# EAGLE board bombhonor (EAGLE 9.5.2), part 1 of 2
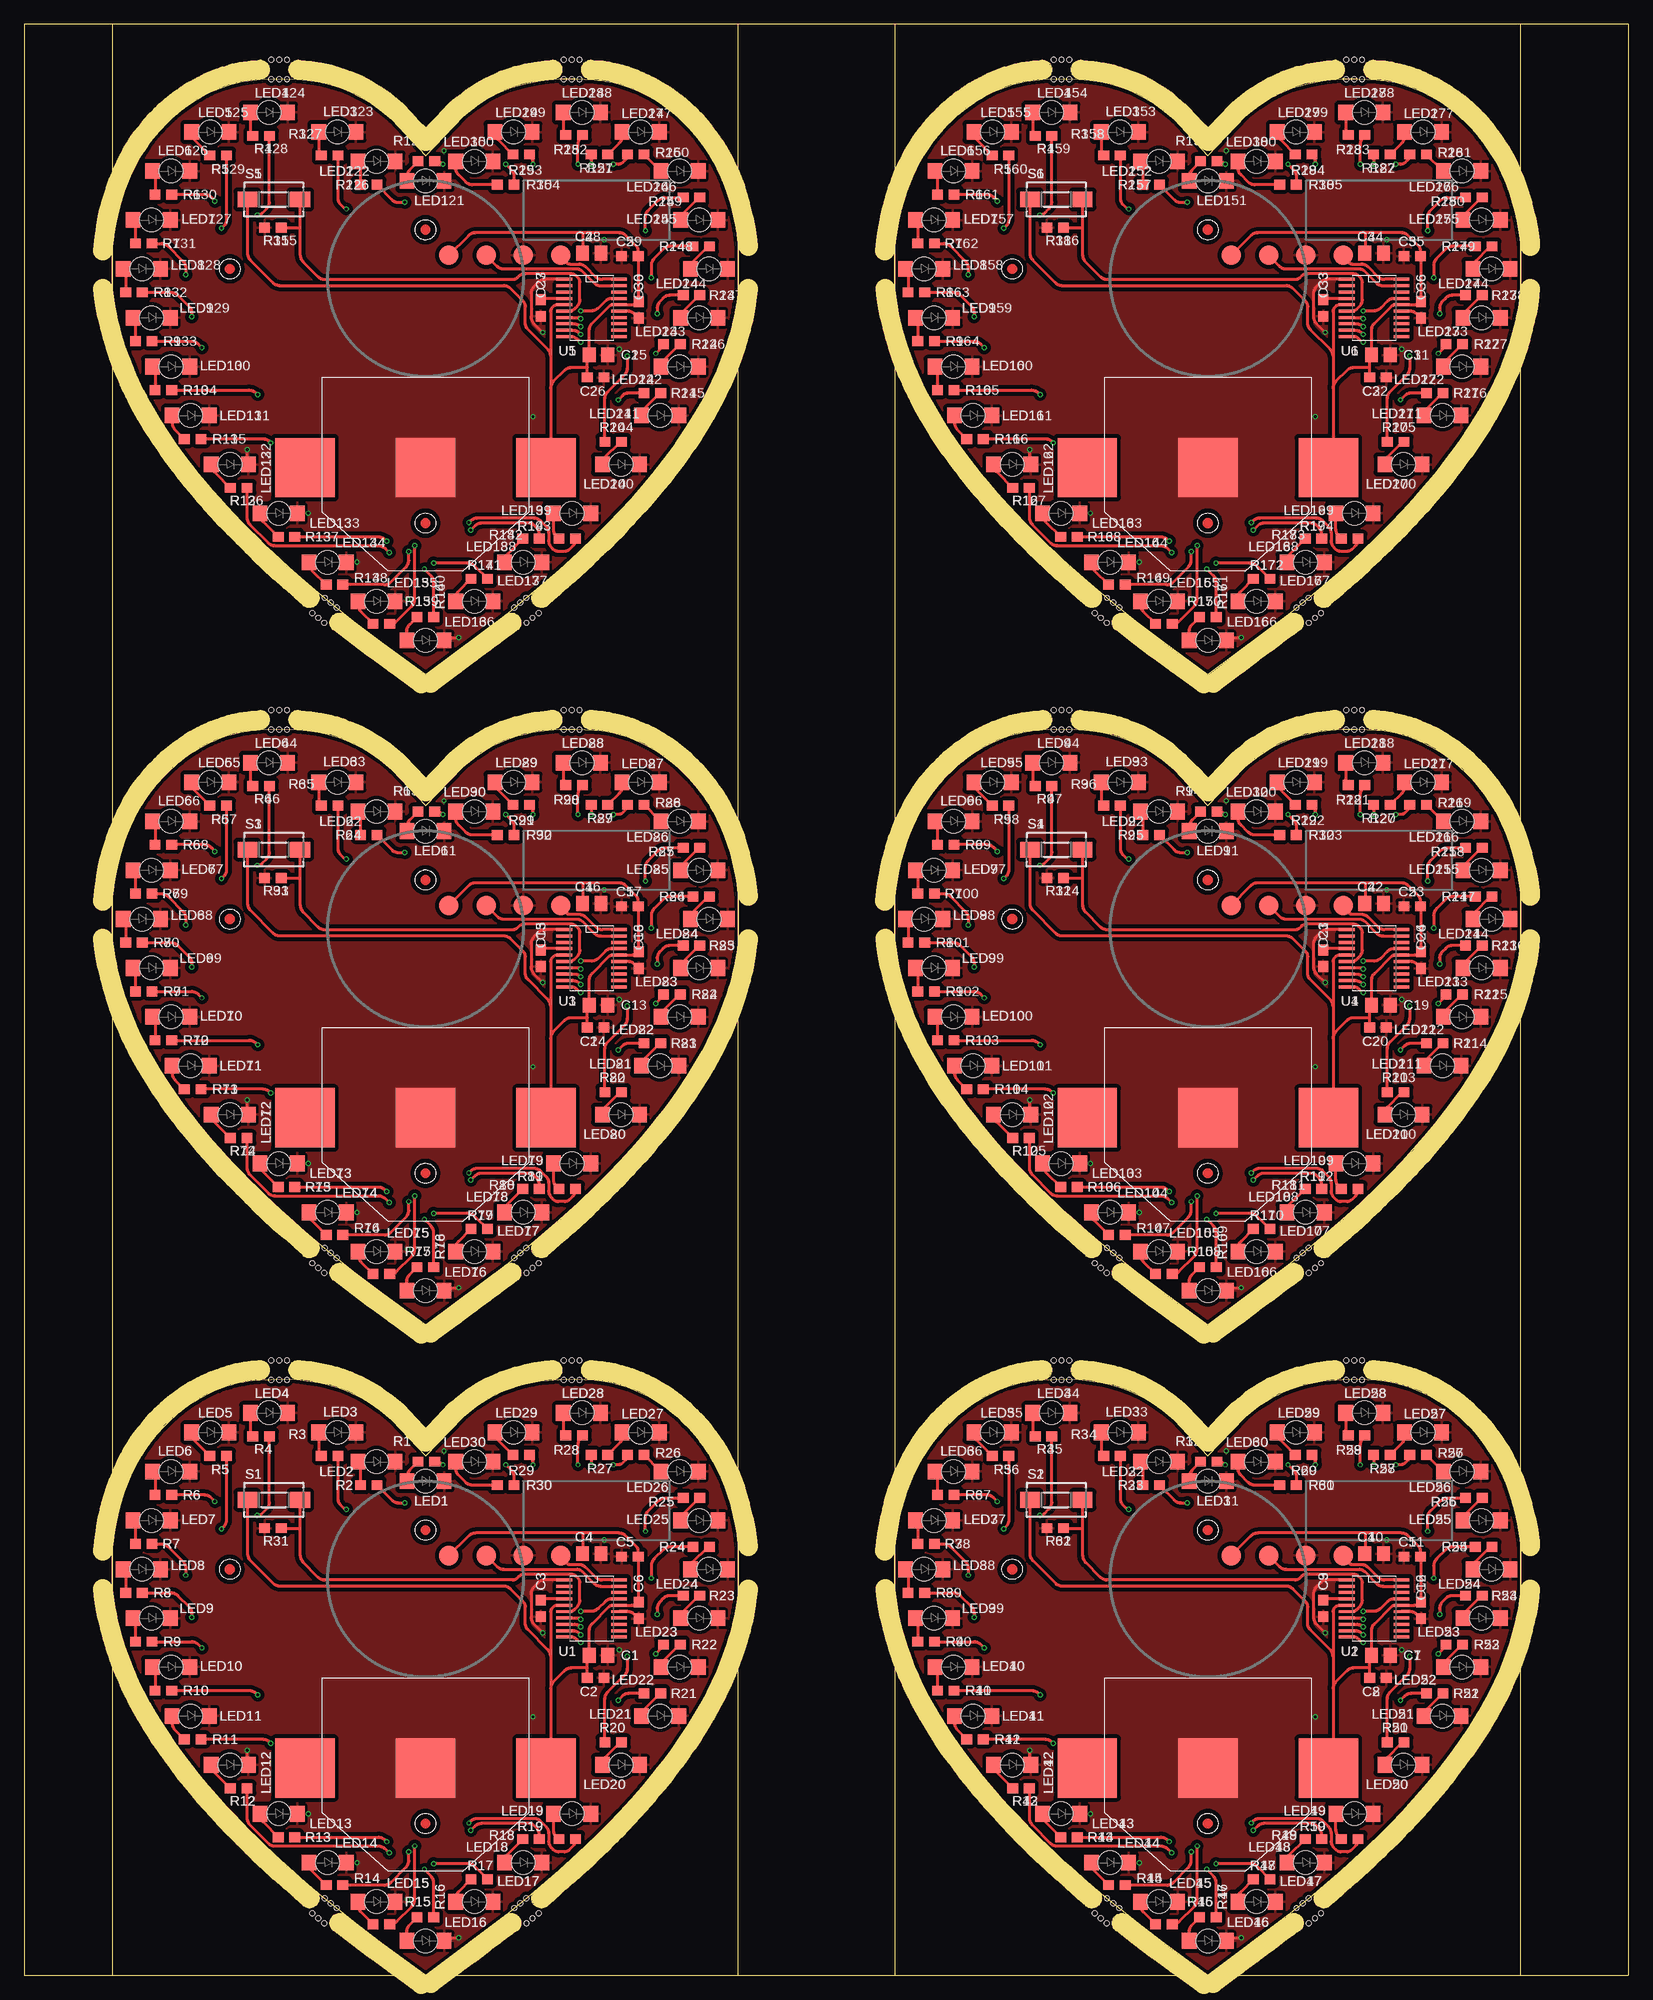
[diagram p0: board, top side]
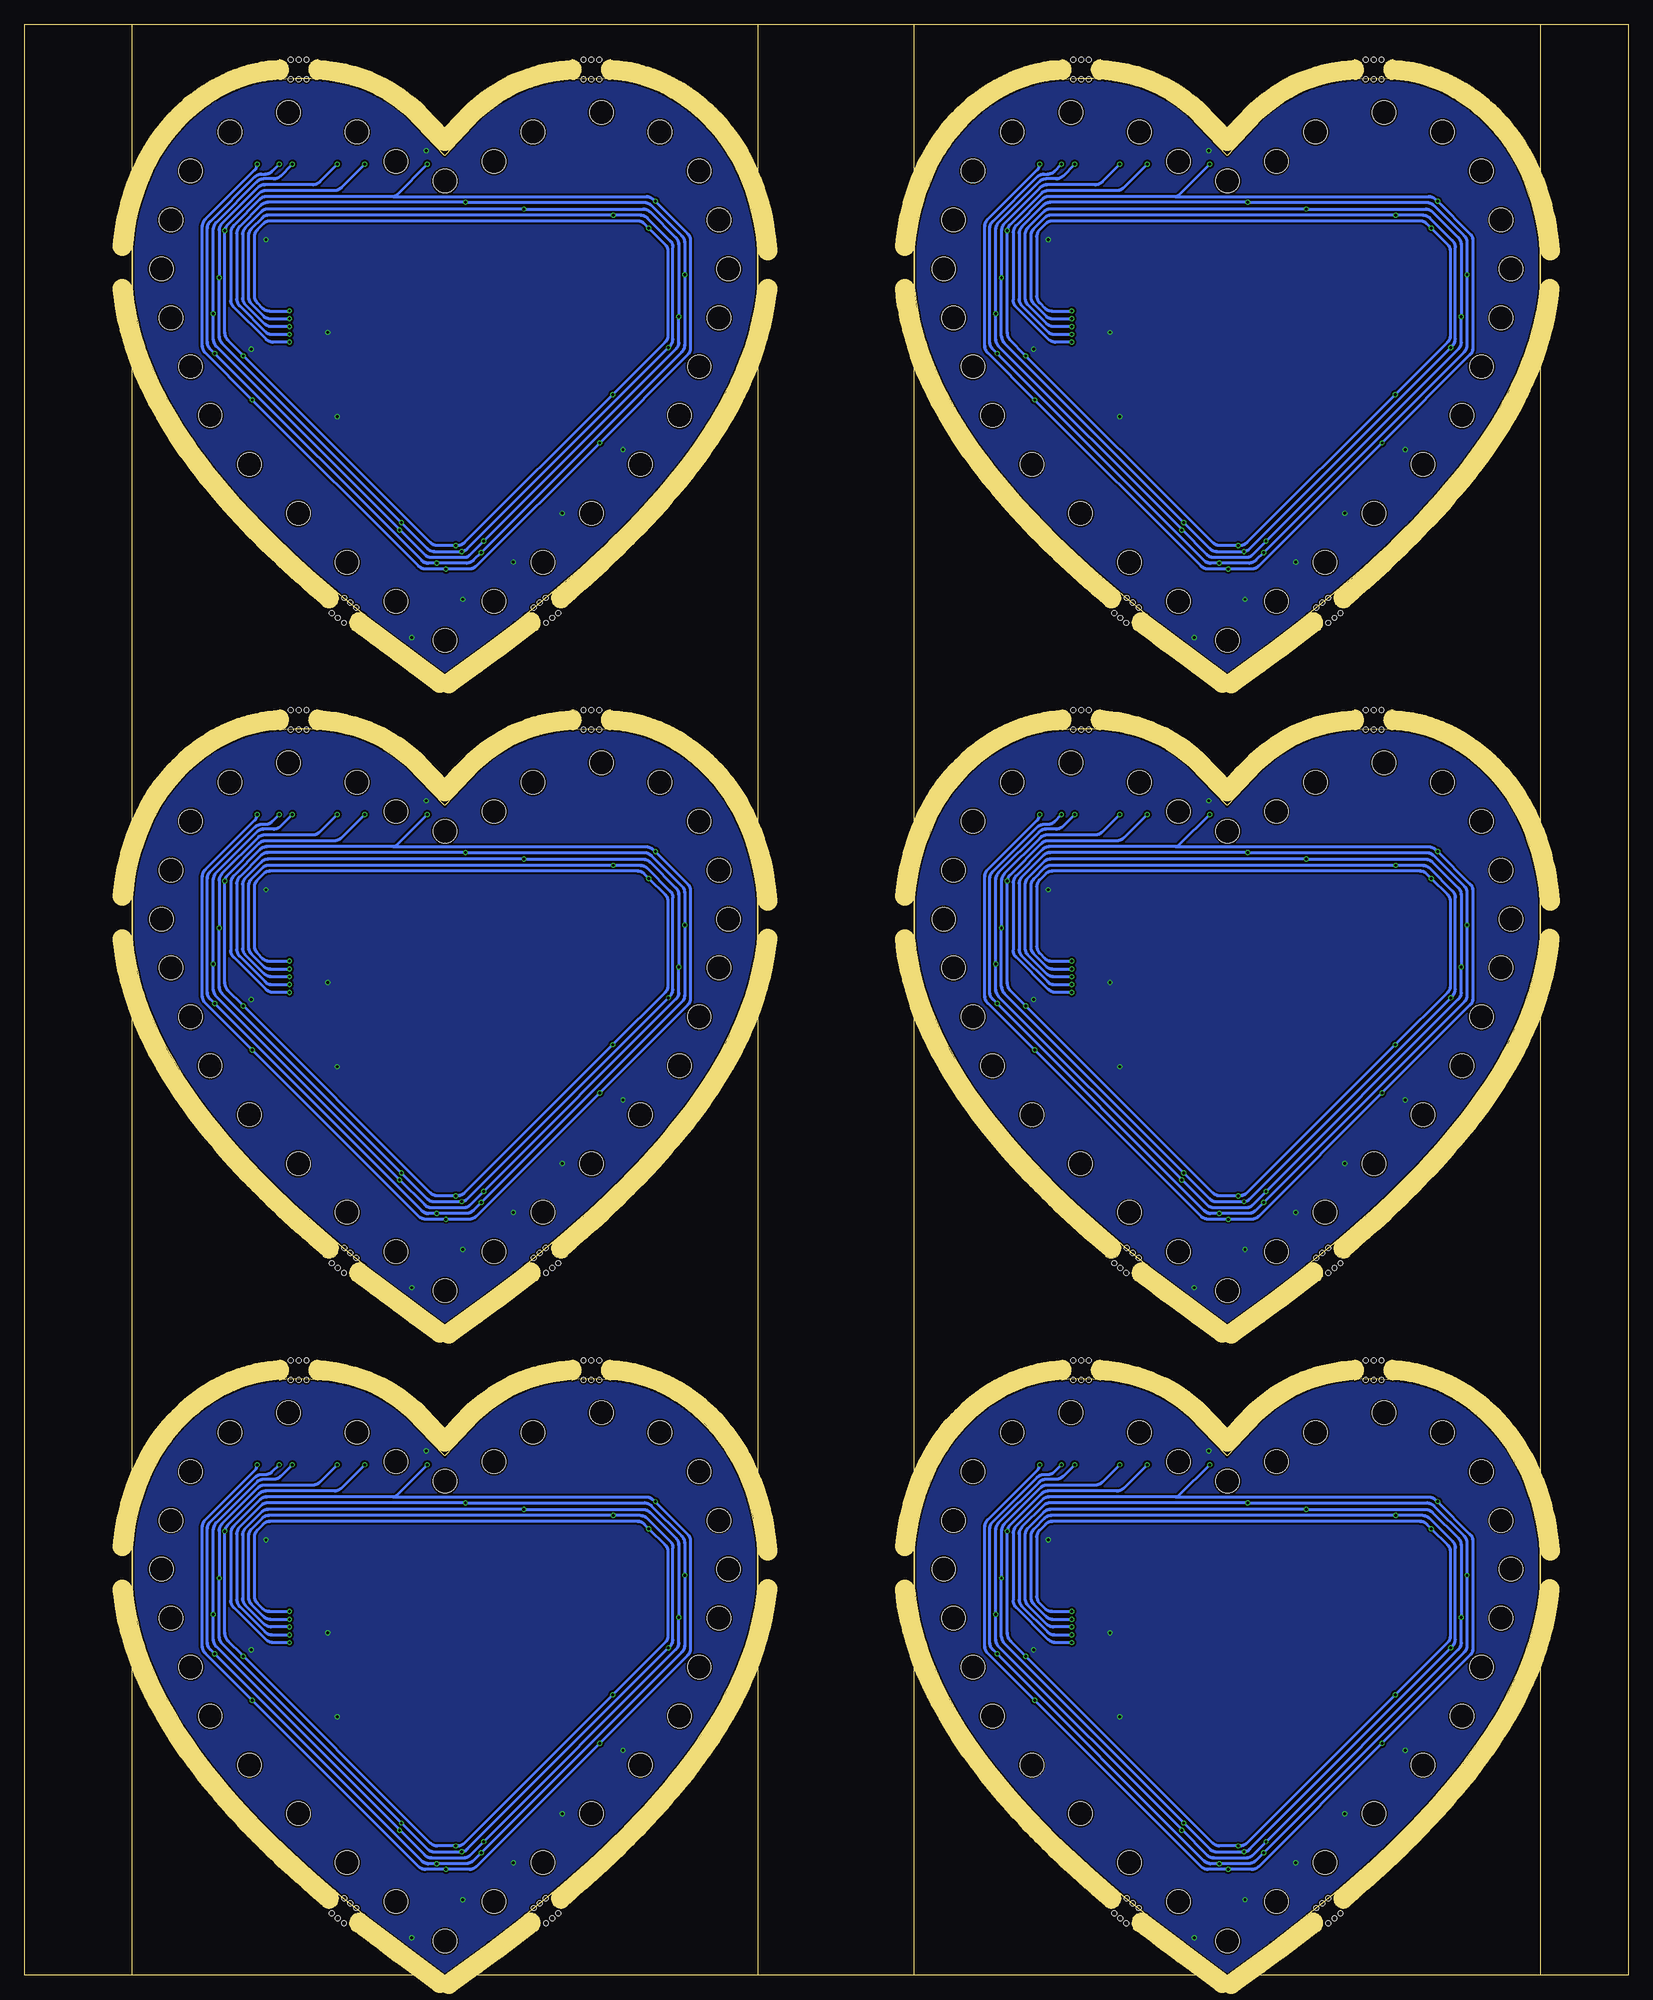
[diagram p1: board, bottom side, seen from below]

Size 164 x 199.5 mm. Coordinates in mm from the lower left corner, seen from the top.
Outline: 1144 segments
Copper layers (1*16): Top 0.018mm / dielectric 1.55mm / Bottom 0.018mm
Design rules "ALLPCB *": minimum track width 0.3mm, minimum drill 0.3mm, track to track 0.2mm, track to pad 0.2mm, pad to pad 0.2mm, via to via 0.2mm, smd to smd 0mil, copper to edge 0.2mm, drill to drill 0.2mm, minimum pad ring 0.125mm, minimum via ring 0.1mm, stop-mask expansion 2mil, vias tented up to drill 0.45mm, thermal gap 0.3mm
Net classes: 0 default: width 0.2 mm, drill 0.3 mm
Milling: 1192 lines

## Footprints (pad centres in the part's own frame; a part is rotated, then mirrored left to right if it is on the bottom)
MOUSE_BITE_2MM = hole 0.5: 0,1; 0.8,1; -0.8,1; -0.8,-1; 0,-1; 0.8,-1
BK-883-TR = smd 6.07 x 6.07: V+1 -12.33,0.675; V+2 12.33,0.675; V- 0,0.675
0805[2012] = smd 1.3 x 1.5: 1 -0.95,0; 2 0.95,0
0603[1608] = smd 1.1 x 1: 1 -0.85,0; 2 0.85,0
1206[3216]BOTTOM_ENTRY = smd 1.5 x 1.6: A -1.9,0; K 1.9,0 | hole 2.4: 0,0
DTSM-3 = smd 2 x 1.6: 1 -2.7,0; 2 2.7,0
TP-2MM = smd 2 x 2: TP 0,0
TSSOP20 = smd 0.3 x 1.6: 1 -2.925,-2.8; 2 -2.275,-2.8; 3 -1.625,-2.8; 4 -0.975,-2.8; 5 -0.325,-2.8; 6 0.325,-2.8; 7 0.975,-2.8; 8 1.625,-2.8; 9 2.275,-2.8; 10 2.925,-2.8; 11 2.925,2.8; 12 2.275,2.8; 13 1.625,2.8; 14 0.975,2.8; 15 0.325,2.8; 16 -0.325,2.8; 17 -0.975,2.8; 18 -1.625,2.8; 19 -2.275,2.8; 20 -2.925,2.8

## Placement (x,y rotation side)
1  [MOUSE_BITE_2MM]  26.04,61.88 0 top
2  [MOUSE_BITE_2MM]  55.96,61.88 0 top
3  [MOUSE_BITE_2MM]  106.04,61.88 0 top
4  [MOUSE_BITE_2MM]  135.96,61.88 0 top
5  [MOUSE_BITE_2MM]  26.04,128.38 0 top
6  [MOUSE_BITE_2MM]  55.96,128.38 0 top
7  [MOUSE_BITE_2MM]  106.04,128.38 0 top
8  [MOUSE_BITE_2MM]  135.96,128.38 0 top
9  [MOUSE_BITE_2MM]  26.04,194.88 0 top
10  [MOUSE_BITE_2MM]  55.96,194.88 0 top
11  [MOUSE_BITE_2MM]  106.04,194.88 0 top
12  [MOUSE_BITE_2MM]  135.96,194.88 0 top
BATT1  BK-883-TR  [BK-883-TR]  41,20.5 0 top
BATT2  BK-883-TR  [BK-883-TR]  121,20.5 0 top
BATT3  BK-883-TR  [BK-883-TR]  41,87 0 top
BATT4  BK-883-TR  [BK-883-TR]  121,87 0 top
BATT5  BK-883-TR  [BK-883-TR]  41,153.5 0 top
BATT6  BK-883-TR  [BK-883-TR]  121,153.5 0 top
C1  10u  [0805[2012]]  58.7,32.7 0 top
C2  0.1u  [0603[1608]]  58.4,30.4 0 top
C3  0.1u  [0603[1608]]  52.8,37.5 270 top
C4  10u  [0805[2012]]  58,43.1 0 top
C5  0.1u  [0603[1608]]  61.9,42.8 180 top
C6  0.1u  [0603[1608]]  62.8,37.3 270 top
C7  10u  [0805[2012]]  138.7,32.7 0 top
C8  0.1u  [0603[1608]]  138.4,30.4 0 top
C9  0.1u  [0603[1608]]  132.8,37.5 270 top
C10  10u  [0805[2012]]  138,43.1 0 top
C11  0.1u  [0603[1608]]  141.9,42.8 180 top
C12  0.1u  [0603[1608]]  142.8,37.3 270 top
C13  10u  [0805[2012]]  58.7,99.2 0 top
C14  0.1u  [0603[1608]]  58.4,96.9 0 top
C15  0.1u  [0603[1608]]  52.8,104 270 top
C16  10u  [0805[2012]]  58,109.6 0 top
C17  0.1u  [0603[1608]]  61.9,109.3 180 top
C18  0.1u  [0603[1608]]  62.8,103.8 270 top
C19  10u  [0805[2012]]  138.7,99.2 0 top
C20  0.1u  [0603[1608]]  138.4,96.9 0 top
C21  0.1u  [0603[1608]]  132.8,104 270 top
C22  10u  [0805[2012]]  138,109.6 0 top
C23  0.1u  [0603[1608]]  141.9,109.3 180 top
C24  0.1u  [0603[1608]]  142.8,103.8 270 top
C25  10u  [0805[2012]]  58.7,165.7 0 top
C26  0.1u  [0603[1608]]  58.4,163.4 0 top
C27  0.1u  [0603[1608]]  52.8,170.5 270 top
C28  10u  [0805[2012]]  58,176.1 0 top
C29  0.1u  [0603[1608]]  61.9,175.8 180 top
C30  0.1u  [0603[1608]]  62.8,170.3 270 top
C31  10u  [0805[2012]]  138.7,165.7 0 top
C32  0.1u  [0603[1608]]  138.4,163.4 0 top
C33  0.1u  [0603[1608]]  132.8,170.5 270 top
C34  10u  [0805[2012]]  138,176.1 0 top
C35  0.1u  [0603[1608]]  141.9,175.8 180 top
C36  0.1u  [0603[1608]]  142.8,170.3 270 top
LED1  BLUE  [1206[3216]BOTTOM_ENTRY]  41,50.5 0 top
LED2  BLUE  [1206[3216]BOTTOM_ENTRY]  36,52.5 0 top
LED3  BLUE  [1206[3216]BOTTOM_ENTRY]  32,55.5 0 top
LED4  BLUE  [1206[3216]BOTTOM_ENTRY]  25,57.5 0 top
LED5  BLUE  [1206[3216]BOTTOM_ENTRY]  19,55.5 0 top
LED6  BLUE  [1206[3216]BOTTOM_ENTRY]  15,51.5 0 top
LED7  BLUE  [1206[3216]BOTTOM_ENTRY]  13,46.5 0 top
LED8  BLUE  [1206[3216]BOTTOM_ENTRY]  12,41.5 0 top
LED9  BLUE  [1206[3216]BOTTOM_ENTRY]  13,36.5 0 top
LED10  BLUE  [1206[3216]BOTTOM_ENTRY]  15,31.5 0 top
LED11  BLUE  [1206[3216]BOTTOM_ENTRY]  17,26.5 0 top
LED12  BLUE  [1206[3216]BOTTOM_ENTRY]  21,21.5 0 top
LED13  BLUE  [1206[3216]BOTTOM_ENTRY]  26,16.5 0 top
LED14  BLUE  [1206[3216]BOTTOM_ENTRY]  31,11.5 0 top
LED15  BLUE  [1206[3216]BOTTOM_ENTRY]  36,7.5 0 top
LED16  BLUE  [1206[3216]BOTTOM_ENTRY]  41,3.5 0 top
LED17  BLUE  [1206[3216]BOTTOM_ENTRY]  46,7.5 0 top
LED18  BLUE  [1206[3216]BOTTOM_ENTRY]  51,11.5 0 top
LED19  BLUE  [1206[3216]BOTTOM_ENTRY]  56,16.5 0 top
LED20  BLUE  [1206[3216]BOTTOM_ENTRY]  61,21.5 0 top
LED21  BLUE  [1206[3216]BOTTOM_ENTRY]  65,26.5 0 top
LED22  BLUE  [1206[3216]BOTTOM_ENTRY]  67,31.5 0 top
LED23  BLUE  [1206[3216]BOTTOM_ENTRY]  69,36.5 0 top
LED24  BLUE  [1206[3216]BOTTOM_ENTRY]  70,41.5 0 top
LED25  BLUE  [1206[3216]BOTTOM_ENTRY]  69,46.5 0 top
LED26  BLUE  [1206[3216]BOTTOM_ENTRY]  67,51.5 0 top
LED27  BLUE  [1206[3216]BOTTOM_ENTRY]  63,55.5 0 top
LED28  BLUE  [1206[3216]BOTTOM_ENTRY]  57,57.5 0 top
LED29  BLUE  [1206[3216]BOTTOM_ENTRY]  50,55.5 0 top
LED30  BLUE  [1206[3216]BOTTOM_ENTRY]  46,52.5 0 top
LED31  BLUE  [1206[3216]BOTTOM_ENTRY]  121,50.5 0 top
LED32  BLUE  [1206[3216]BOTTOM_ENTRY]  116,52.5 0 top
LED33  BLUE  [1206[3216]BOTTOM_ENTRY]  112,55.5 0 top
LED34  BLUE  [1206[3216]BOTTOM_ENTRY]  105,57.5 0 top
LED35  BLUE  [1206[3216]BOTTOM_ENTRY]  99,55.5 0 top
LED36  BLUE  [1206[3216]BOTTOM_ENTRY]  95,51.5 0 top
LED37  BLUE  [1206[3216]BOTTOM_ENTRY]  93,46.5 0 top
LED38  BLUE  [1206[3216]BOTTOM_ENTRY]  92,41.5 0 top
LED39  BLUE  [1206[3216]BOTTOM_ENTRY]  93,36.5 0 top
LED40  BLUE  [1206[3216]BOTTOM_ENTRY]  95,31.5 0 top
LED41  BLUE  [1206[3216]BOTTOM_ENTRY]  97,26.5 0 top
LED42  BLUE  [1206[3216]BOTTOM_ENTRY]  101,21.5 0 top
LED43  BLUE  [1206[3216]BOTTOM_ENTRY]  106,16.5 0 top
LED44  BLUE  [1206[3216]BOTTOM_ENTRY]  111,11.5 0 top
LED45  BLUE  [1206[3216]BOTTOM_ENTRY]  116,7.5 0 top
LED46  BLUE  [1206[3216]BOTTOM_ENTRY]  121,3.5 0 top
LED47  BLUE  [1206[3216]BOTTOM_ENTRY]  126,7.5 0 top
LED48  BLUE  [1206[3216]BOTTOM_ENTRY]  131,11.5 0 top
LED49  BLUE  [1206[3216]BOTTOM_ENTRY]  136,16.5 0 top
LED50  BLUE  [1206[3216]BOTTOM_ENTRY]  141,21.5 0 top
LED51  BLUE  [1206[3216]BOTTOM_ENTRY]  145,26.5 0 top
LED52  BLUE  [1206[3216]BOTTOM_ENTRY]  147,31.5 0 top
LED53  BLUE  [1206[3216]BOTTOM_ENTRY]  149,36.5 0 top
LED54  BLUE  [1206[3216]BOTTOM_ENTRY]  150,41.5 0 top
LED55  BLUE  [1206[3216]BOTTOM_ENTRY]  149,46.5 0 top
LED56  BLUE  [1206[3216]BOTTOM_ENTRY]  147,51.5 0 top
LED57  BLUE  [1206[3216]BOTTOM_ENTRY]  143,55.5 0 top
LED58  BLUE  [1206[3216]BOTTOM_ENTRY]  137,57.5 0 top
LED59  BLUE  [1206[3216]BOTTOM_ENTRY]  130,55.5 0 top
LED60  BLUE  [1206[3216]BOTTOM_ENTRY]  126,52.5 0 top
LED61  BLUE  [1206[3216]BOTTOM_ENTRY]  41,117 0 top
LED62  BLUE  [1206[3216]BOTTOM_ENTRY]  36,119 0 top
LED63  BLUE  [1206[3216]BOTTOM_ENTRY]  32,122 0 top
LED64  BLUE  [1206[3216]BOTTOM_ENTRY]  25,124 0 top
LED65  BLUE  [1206[3216]BOTTOM_ENTRY]  19,122 0 top
LED66  BLUE  [1206[3216]BOTTOM_ENTRY]  15,118 0 top
LED67  BLUE  [1206[3216]BOTTOM_ENTRY]  13,113 0 top
LED68  BLUE  [1206[3216]BOTTOM_ENTRY]  12,108 0 top
LED69  BLUE  [1206[3216]BOTTOM_ENTRY]  13,103 0 top
LED70  BLUE  [1206[3216]BOTTOM_ENTRY]  15,98 0 top
LED71  BLUE  [1206[3216]BOTTOM_ENTRY]  17,93 0 top
LED72  BLUE  [1206[3216]BOTTOM_ENTRY]  21,88 0 top
LED73  BLUE  [1206[3216]BOTTOM_ENTRY]  26,83 0 top
LED74  BLUE  [1206[3216]BOTTOM_ENTRY]  31,78 0 top
LED75  BLUE  [1206[3216]BOTTOM_ENTRY]  36,74 0 top
LED76  BLUE  [1206[3216]BOTTOM_ENTRY]  41,70 0 top
LED77  BLUE  [1206[3216]BOTTOM_ENTRY]  46,74 0 top
LED78  BLUE  [1206[3216]BOTTOM_ENTRY]  51,78 0 top
LED79  BLUE  [1206[3216]BOTTOM_ENTRY]  56,83 0 top
LED80  BLUE  [1206[3216]BOTTOM_ENTRY]  61,88 0 top
LED81  BLUE  [1206[3216]BOTTOM_ENTRY]  65,93 0 top
LED82  BLUE  [1206[3216]BOTTOM_ENTRY]  67,98 0 top
LED83  BLUE  [1206[3216]BOTTOM_ENTRY]  69,103 0 top
LED84  BLUE  [1206[3216]BOTTOM_ENTRY]  70,108 0 top
LED85  BLUE  [1206[3216]BOTTOM_ENTRY]  69,113 0 top
LED86  BLUE  [1206[3216]BOTTOM_ENTRY]  67,118 0 top
LED87  BLUE  [1206[3216]BOTTOM_ENTRY]  63,122 0 top
LED88  BLUE  [1206[3216]BOTTOM_ENTRY]  57,124 0 top
LED89  BLUE  [1206[3216]BOTTOM_ENTRY]  50,122 0 top
LED90  BLUE  [1206[3216]BOTTOM_ENTRY]  46,119 0 top
LED91  BLUE  [1206[3216]BOTTOM_ENTRY]  121,117 0 top
LED92  BLUE  [1206[3216]BOTTOM_ENTRY]  116,119 0 top
LED93  BLUE  [1206[3216]BOTTOM_ENTRY]  112,122 0 top
LED94  BLUE  [1206[3216]BOTTOM_ENTRY]  105,124 0 top
LED95  BLUE  [1206[3216]BOTTOM_ENTRY]  99,122 0 top
LED96  BLUE  [1206[3216]BOTTOM_ENTRY]  95,118 0 top
LED97  BLUE  [1206[3216]BOTTOM_ENTRY]  93,113 0 top
LED98  BLUE  [1206[3216]BOTTOM_ENTRY]  92,108 0 top
LED99  BLUE  [1206[3216]BOTTOM_ENTRY]  93,103 0 top
LED100  BLUE  [1206[3216]BOTTOM_ENTRY]  95,98 0 top
LED101  BLUE  [1206[3216]BOTTOM_ENTRY]  97,93 0 top
LED102  BLUE  [1206[3216]BOTTOM_ENTRY]  101,88 0 top
LED103  BLUE  [1206[3216]BOTTOM_ENTRY]  106,83 0 top
LED104  BLUE  [1206[3216]BOTTOM_ENTRY]  111,78 0 top
LED105  BLUE  [1206[3216]BOTTOM_ENTRY]  116,74 0 top
LED106  BLUE  [1206[3216]BOTTOM_ENTRY]  121,70 0 top
LED107  BLUE  [1206[3216]BOTTOM_ENTRY]  126,74 0 top
LED108  BLUE  [1206[3216]BOTTOM_ENTRY]  131,78 0 top
LED109  BLUE  [1206[3216]BOTTOM_ENTRY]  136,83 0 top
LED110  BLUE  [1206[3216]BOTTOM_ENTRY]  141,88 0 top
LED111  BLUE  [1206[3216]BOTTOM_ENTRY]  145,93 0 top
LED112  BLUE  [1206[3216]BOTTOM_ENTRY]  147,98 0 top
LED113  BLUE  [1206[3216]BOTTOM_ENTRY]  149,103 0 top
LED114  BLUE  [1206[3216]BOTTOM_ENTRY]  150,108 0 top
LED115  BLUE  [1206[3216]BOTTOM_ENTRY]  149,113 0 top
LED116  BLUE  [1206[3216]BOTTOM_ENTRY]  147,118 0 top
LED117  BLUE  [1206[3216]BOTTOM_ENTRY]  143,122 0 top
LED118  BLUE  [1206[3216]BOTTOM_ENTRY]  137,124 0 top
LED119  BLUE  [1206[3216]BOTTOM_ENTRY]  130,122 0 top
LED120  BLUE  [1206[3216]BOTTOM_ENTRY]  126,119 0 top
LED121  BLUE  [1206[3216]BOTTOM_ENTRY]  41,183.5 0 top
LED122  BLUE  [1206[3216]BOTTOM_ENTRY]  36,185.5 0 top
LED123  BLUE  [1206[3216]BOTTOM_ENTRY]  32,188.5 0 top
LED124  BLUE  [1206[3216]BOTTOM_ENTRY]  25,190.5 0 top
LED125  BLUE  [1206[3216]BOTTOM_ENTRY]  19,188.5 0 top
LED126  BLUE  [1206[3216]BOTTOM_ENTRY]  15,184.5 0 top
LED127  BLUE  [1206[3216]BOTTOM_ENTRY]  13,179.5 0 top
LED128  BLUE  [1206[3216]BOTTOM_ENTRY]  12,174.5 0 top
LED129  BLUE  [1206[3216]BOTTOM_ENTRY]  13,169.5 0 top
LED130  BLUE  [1206[3216]BOTTOM_ENTRY]  15,164.5 0 top
LED131  BLUE  [1206[3216]BOTTOM_ENTRY]  17,159.5 0 top
LED132  BLUE  [1206[3216]BOTTOM_ENTRY]  21,154.5 0 top
LED133  BLUE  [1206[3216]BOTTOM_ENTRY]  26,149.5 0 top
LED134  BLUE  [1206[3216]BOTTOM_ENTRY]  31,144.5 0 top
LED135  BLUE  [1206[3216]BOTTOM_ENTRY]  36,140.5 0 top
LED136  BLUE  [1206[3216]BOTTOM_ENTRY]  41,136.5 0 top
LED137  BLUE  [1206[3216]BOTTOM_ENTRY]  46,140.5 0 top
LED138  BLUE  [1206[3216]BOTTOM_ENTRY]  51,144.5 0 top
LED139  BLUE  [1206[3216]BOTTOM_ENTRY]  56,149.5 0 top
LED140  BLUE  [1206[3216]BOTTOM_ENTRY]  61,154.5 0 top
LED141  BLUE  [1206[3216]BOTTOM_ENTRY]  65,159.5 0 top
LED142  BLUE  [1206[3216]BOTTOM_ENTRY]  67,164.5 0 top
LED143  BLUE  [1206[3216]BOTTOM_ENTRY]  69,169.5 0 top
LED144  BLUE  [1206[3216]BOTTOM_ENTRY]  70,174.5 0 top
LED145  BLUE  [1206[3216]BOTTOM_ENTRY]  69,179.5 0 top
LED146  BLUE  [1206[3216]BOTTOM_ENTRY]  67,184.5 0 top
LED147  BLUE  [1206[3216]BOTTOM_ENTRY]  63,188.5 0 top
LED148  BLUE  [1206[3216]BOTTOM_ENTRY]  57,190.5 0 top
LED149  BLUE  [1206[3216]BOTTOM_ENTRY]  50,188.5 0 top
LED150  BLUE  [1206[3216]BOTTOM_ENTRY]  46,185.5 0 top
LED151  BLUE  [1206[3216]BOTTOM_ENTRY]  121,183.5 0 top
LED152  BLUE  [1206[3216]BOTTOM_ENTRY]  116,185.5 0 top
LED153  BLUE  [1206[3216]BOTTOM_ENTRY]  112,188.5 0 top
LED154  BLUE  [1206[3216]BOTTOM_ENTRY]  105,190.5 0 top
LED155  BLUE  [1206[3216]BOTTOM_ENTRY]  99,188.5 0 top
LED156  BLUE  [1206[3216]BOTTOM_ENTRY]  95,184.5 0 top
LED157  BLUE  [1206[3216]BOTTOM_ENTRY]  93,179.5 0 top
LED158  BLUE  [1206[3216]BOTTOM_ENTRY]  92,174.5 0 top
LED159  BLUE  [1206[3216]BOTTOM_ENTRY]  93,169.5 0 top
LED160  BLUE  [1206[3216]BOTTOM_ENTRY]  95,164.5 0 top
LED161  BLUE  [1206[3216]BOTTOM_ENTRY]  97,159.5 0 top
LED162  BLUE  [1206[3216]BOTTOM_ENTRY]  101,154.5 0 top
LED163  BLUE  [1206[3216]BOTTOM_ENTRY]  106,149.5 0 top
LED164  BLUE  [1206[3216]BOTTOM_ENTRY]  111,144.5 0 top
LED165  BLUE  [1206[3216]BOTTOM_ENTRY]  116,140.5 0 top
LED166  BLUE  [1206[3216]BOTTOM_ENTRY]  121,136.5 0 top
LED167  BLUE  [1206[3216]BOTTOM_ENTRY]  126,140.5 0 top
LED168  BLUE  [1206[3216]BOTTOM_ENTRY]  131,144.5 0 top
LED169  BLUE  [1206[3216]BOTTOM_ENTRY]  136,149.5 0 top
LED170  BLUE  [1206[3216]BOTTOM_ENTRY]  141,154.5 0 top
LED171  BLUE  [1206[3216]BOTTOM_ENTRY]  145,159.5 0 top
LED172  BLUE  [1206[3216]BOTTOM_ENTRY]  147,164.5 0 top
LED173  BLUE  [1206[3216]BOTTOM_ENTRY]  149,169.5 0 top
LED174  BLUE  [1206[3216]BOTTOM_ENTRY]  150,174.5 0 top
LED175  BLUE  [1206[3216]BOTTOM_ENTRY]  149,179.5 0 top
LED176  BLUE  [1206[3216]BOTTOM_ENTRY]  147,184.5 0 top
LED177  BLUE  [1206[3216]BOTTOM_ENTRY]  143,188.5 0 top
LED178  BLUE  [1206[3216]BOTTOM_ENTRY]  137,190.5 0 top
LED179  BLUE  [1206[3216]BOTTOM_ENTRY]  130,188.5 0 top
LED180  BLUE  [1206[3216]BOTTOM_ENTRY]  126,185.5 0 top
R1  1k  [0603[1608]]  41.1,52.5 0 top
R2  1k  [0603[1608]]  35.2,50.1 0 top
R3  1k  [0603[1608]]  31.2,53.1 0 top
R4  1k  [0603[1608]]  24.2,55.1 0 top
R5  1k  [0603[1608]]  19.8,53.1 0 top
R6  1k  [0603[1608]]  14.2,49.1 0 top
R7  1k  [0603[1608]]  12.2,44.1 0 top
R8  1k  [0603[1608]]  11.2,39.1 0 top
R9  1k  [0603[1608]]  12.2,34.1 0 top
R10  1k  [0603[1608]]  14.2,29.1 0 top
R11  1k  [0603[1608]]  17.2,24.1 0 top
R12  1k  [0603[1608]]  21.9,19.1 0 top
R13  1k  [0603[1608]]  26.8,14.1 0 top
R14  1k  [0603[1608]]  31.7,9.2 0 top
R15  1k  [0603[1608]]  36.5,5.2 0 top
R16  1k  [0603[1608]]  41,5.9 0 top
R17  1k  [0603[1608]]  46.5,9.8 0 top
R18  1k  [0603[1608]]  51.8,13.9 0 top
R19  1k  [0603[1608]]  55.5,13.9 0 top
R20  1k  [0603[1608]]  60.2,23.8 180 top
R21  1k  [0603[1608]]  64.2,28.8 180 top
R22  1k  [0603[1608]]  66.2,33.8 180 top
R23  1k  [0603[1608]]  68.2,38.8 180 top
R24  1k  [0603[1608]]  69.2,43.8 180 top
R25  1k  [0603[1608]]  68.2,48.8 180 top
R26  1k  [0603[1608]]  62.5,53.2 180 top
R27  1k  [0603[1608]]  58.8,53.2 180 top
R28  1k  [0603[1608]]  56.2,55.2 0 top
R29  1k  [0603[1608]]  50.8,53.2 0 top
R30  1k  [0603[1608]]  49.2,50.1 0 top
R31  1k  [0603[1608]]  25.4,45.7 0 top
R32  1k  [0603[1608]]  121.1,52.5 0 top
R33  1k  [0603[1608]]  115.2,50.1 0 top
R34  1k  [0603[1608]]  111.2,53.1 0 top
R35  1k  [0603[1608]]  104.2,55.1 0 top
R36  1k  [0603[1608]]  99.8,53.1 0 top
R37  1k  [0603[1608]]  94.2,49.1 0 top
R38  1k  [0603[1608]]  92.2,44.1 0 top
R39  1k  [0603[1608]]  91.2,39.1 0 top
R40  1k  [0603[1608]]  92.2,34.1 0 top
R41  1k  [0603[1608]]  94.2,29.1 0 top
R42  1k  [0603[1608]]  97.2,24.1 0 top
R43  1k  [0603[1608]]  101.9,19.1 0 top
R44  1k  [0603[1608]]  106.8,14.1 0 top
R45  1k  [0603[1608]]  111.7,9.2 0 top
R46  1k  [0603[1608]]  116.5,5.2 0 top
R47  1k  [0603[1608]]  121,5.9 0 top
R48  1k  [0603[1608]]  126.5,9.8 0 top
R49  1k  [0603[1608]]  131.8,13.9 0 top
R50  1k  [0603[1608]]  135.5,13.9 0 top
R51  1k  [0603[1608]]  140.2,23.8 180 top
R52  1k  [0603[1608]]  144.2,28.8 180 top
R53  1k  [0603[1608]]  146.2,33.8 180 top
R54  1k  [0603[1608]]  148.2,38.8 180 top
R55  1k  [0603[1608]]  149.2,43.8 180 top
R56  1k  [0603[1608]]  148.2,48.8 180 top
R57  1k  [0603[1608]]  142.5,53.2 180 top
R58  1k  [0603[1608]]  138.8,53.2 180 top
R59  1k  [0603[1608]]  136.2,55.2 0 top
R60  1k  [0603[1608]]  130.8,53.2 0 top
R61  1k  [0603[1608]]  129.2,50.1 0 top
R62  1k  [0603[1608]]  105.4,45.7 0 top
R63  1k  [0603[1608]]  41.1,119 0 top
R64  1k  [0603[1608]]  35.2,116.6 0 top
R65  1k  [0603[1608]]  31.2,119.6 0 top
R66  1k  [0603[1608]]  24.2,121.6 0 top
R67  1k  [0603[1608]]  19.8,119.6 0 top
R68  1k  [0603[1608]]  14.2,115.6 0 top
R69  1k  [0603[1608]]  12.2,110.6 0 top
R70  1k  [0603[1608]]  11.2,105.6 0 top
R71  1k  [0603[1608]]  12.2,100.6 0 top
R72  1k  [0603[1608]]  14.2,95.6 0 top
R73  1k  [0603[1608]]  17.2,90.6 0 top
R74  1k  [0603[1608]]  21.9,85.6 0 top
R75  1k  [0603[1608]]  26.8,80.6 0 top
R76  1k  [0603[1608]]  31.7,75.7 0 top
R77  1k  [0603[1608]]  36.5,71.7 0 top
R78  1k  [0603[1608]]  41,72.4 0 top
R79  1k  [0603[1608]]  46.5,76.3 0 top
R80  1k  [0603[1608]]  51.8,80.4 0 top
R81  1k  [0603[1608]]  55.5,80.4 0 top
R82  1k  [0603[1608]]  60.2,90.3 180 top
R83  1k  [0603[1608]]  64.2,95.3 180 top
R84  1k  [0603[1608]]  66.2,100.3 180 top
R85  1k  [0603[1608]]  68.2,105.3 180 top
R86  1k  [0603[1608]]  69.2,110.3 180 top
R87  1k  [0603[1608]]  68.2,115.3 180 top
R88  1k  [0603[1608]]  62.5,119.7 180 top
R89  1k  [0603[1608]]  58.8,119.7 180 top
R90  1k  [0603[1608]]  56.2,121.7 0 top
R91  1k  [0603[1608]]  50.8,119.7 0 top
R92  1k  [0603[1608]]  49.2,116.6 0 top
R93  1k  [0603[1608]]  25.4,112.2 0 top
R94  1k  [0603[1608]]  121.1,119 0 top
R95  1k  [0603[1608]]  115.2,116.6 0 top
R96  1k  [0603[1608]]  111.2,119.6 0 top
R97  1k  [0603[1608]]  104.2,121.6 0 top
R98  1k  [0603[1608]]  99.8,119.6 0 top
R99  1k  [0603[1608]]  94.2,115.6 0 top
R100  1k  [0603[1608]]  92.2,110.6 0 top
R101  1k  [0603[1608]]  91.2,105.6 0 top
R102  1k  [0603[1608]]  92.2,100.6 0 top
R103  1k  [0603[1608]]  94.2,95.6 0 top
R104  1k  [0603[1608]]  97.2,90.6 0 top
R105  1k  [0603[1608]]  101.9,85.6 0 top
R106  1k  [0603[1608]]  106.8,80.6 0 top
R107  1k  [0603[1608]]  111.7,75.7 0 top
R108  1k  [0603[1608]]  116.5,71.7 0 top
R109  1k  [0603[1608]]  121,72.4 0 top
R110  1k  [0603[1608]]  126.5,76.3 0 top
R111  1k  [0603[1608]]  131.8,80.4 0 top
R112  1k  [0603[1608]]  135.5,80.4 0 top
R113  1k  [0603[1608]]  140.2,90.3 180 top
R114  1k  [0603[1608]]  144.2,95.3 180 top
R115  1k  [0603[1608]]  146.2,100.3 180 top
R116  1k  [0603[1608]]  148.2,105.3 180 top
R117  1k  [0603[1608]]  149.2,110.3 180 top
R118  1k  [0603[1608]]  148.2,115.3 180 top
R119  1k  [0603[1608]]  142.5,119.7 180 top
R120  1k  [0603[1608]]  138.8,119.7 180 top
R121  1k  [0603[1608]]  136.2,121.7 0 top
R122  1k  [0603[1608]]  130.8,119.7 0 top
R123  1k  [0603[1608]]  129.2,116.6 0 top
R124  1k  [0603[1608]]  105.4,112.2 0 top
R125  1k  [0603[1608]]  41.1,185.5 0 top
R126  1k  [0603[1608]]  35.2,183.1 0 top
R127  1k  [0603[1608]]  31.2,186.1 0 top
R128  1k  [0603[1608]]  24.2,188.1 0 top
R129  1k  [0603[1608]]  19.8,186.1 0 top
R130  1k  [0603[1608]]  14.2,182.1 0 top
R131  1k  [0603[1608]]  12.2,177.1 0 top
R132  1k  [0603[1608]]  11.2,172.1 0 top
R133  1k  [0603[1608]]  12.2,167.1 0 top
R134  1k  [0603[1608]]  14.2,162.1 0 top
R135  1k  [0603[1608]]  17.2,157.1 0 top
R136  1k  [0603[1608]]  21.9,152.1 0 top
R137  1k  [0603[1608]]  26.8,147.1 0 top
R138  1k  [0603[1608]]  31.7,142.2 0 top
R139  1k  [0603[1608]]  36.5,138.2 0 top
R140  1k  [0603[1608]]  41,138.9 0 top
R141  1k  [0603[1608]]  46.5,142.8 0 top
R142  1k  [0603[1608]]  51.8,146.9 0 top
R143  1k  [0603[1608]]  55.5,146.9 0 top
R144  1k  [0603[1608]]  60.2,156.8 180 top
R145  1k  [0603[1608]]  64.2,161.8 180 top
R146  1k  [0603[1608]]  66.2,166.8 180 top
R147  1k  [0603[1608]]  68.2,171.8 180 top
R148  1k  [0603[1608]]  69.2,176.8 180 top
R149  1k  [0603[1608]]  68.2,181.8 180 top
R150  1k  [0603[1608]]  62.5,186.2 180 top
R151  1k  [0603[1608]]  58.8,186.2 180 top
R152  1k  [0603[1608]]  56.2,188.2 0 top
R153  1k  [0603[1608]]  50.8,186.2 0 top
R154  1k  [0603[1608]]  49.2,183.1 0 top
R155  1k  [0603[1608]]  25.4,178.7 0 top
R156  1k  [0603[1608]]  121.1,185.5 0 top
R157  1k  [0603[1608]]  115.2,183.1 0 top
R158  1k  [0603[1608]]  111.2,186.1 0 top
R159  1k  [0603[1608]]  104.2,188.1 0 top
R160  1k  [0603[1608]]  99.8,186.1 0 top
R161  1k  [0603[1608]]  94.2,182.1 0 top
R162  1k  [0603[1608]]  92.2,177.1 0 top
R163  1k  [0603[1608]]  91.2,172.1 0 top
R164  1k  [0603[1608]]  92.2,167.1 0 top
R165  1k  [0603[1608]]  94.2,162.1 0 top
R166  1k  [0603[1608]]  97.2,157.1 0 top
R167  1k  [0603[1608]]  101.9,152.1 0 top
R168  1k  [0603[1608]]  106.8,147.1 0 top
R169  1k  [0603[1608]]  111.7,142.2 0 top
R170  1k  [0603[1608]]  116.5,138.2 0 top
R171  1k  [0603[1608]]  121,138.9 0 top
R172  1k  [0603[1608]]  126.5,142.8 0 top
R173  1k  [0603[1608]]  131.8,146.9 0 top
R174  1k  [0603[1608]]  135.5,146.9 0 top
R175  1k  [0603[1608]]  140.2,156.8 180 top
R176  1k  [0603[1608]]  144.2,161.8 180 top
R177  1k  [0603[1608]]  146.2,166.8 180 top
R178  1k  [0603[1608]]  148.2,171.8 180 top
R179  1k  [0603[1608]]  149.2,176.8 180 top
R180  1k  [0603[1608]]  148.2,181.8 180 top
R181  1k  [0603[1608]]  142.5,186.2 180 top
R182  1k  [0603[1608]]  138.8,186.2 180 top
R183  1k  [0603[1608]]  136.2,188.2 0 top
R184  1k  [0603[1608]]  130.8,186.2 0 top
R185  1k  [0603[1608]]  129.2,183.1 0 top
R186  1k  [0603[1608]]  105.4,178.7 0 top
S1  DTSM-3  [DTSM-3]  25.5,48.6 0 top
S2  DTSM-3  [DTSM-3]  105.5,48.6 0 top
S3  DTSM-3  [DTSM-3]  25.5,115.1 0 top
S4  DTSM-3  [DTSM-3]  105.5,115.1 0 top
S5  DTSM-3  [DTSM-3]  25.5,181.6 0 top
S6  DTSM-3  [DTSM-3]  105.5,181.6 0 top
TP1  TESTPAD2MM  [TP-2MM]  43.4,42.9 90 top
TP2  TESTPAD2MM  [TP-2MM]  47.21,42.9 90 top
TP3  TESTPAD2MM  [TP-2MM]  51.02,42.9 90 top
TP4  TESTPAD2MM  [TP-2MM]  54.83,42.9 90 top
TP5  TESTPAD2MM  [TP-2MM]  123.4,42.9 90 top
TP6  TESTPAD2MM  [TP-2MM]  127.21,42.9 90 top
TP7  TESTPAD2MM  [TP-2MM]  131.02,42.9 90 top
TP8  TESTPAD2MM  [TP-2MM]  134.83,42.9 90 top
TP9  TESTPAD2MM  [TP-2MM]  43.4,109.4 90 top
TP10  TESTPAD2MM  [TP-2MM]  47.21,109.4 90 top
TP11  TESTPAD2MM  [TP-2MM]  51.02,109.4 90 top
TP12  TESTPAD2MM  [TP-2MM]  54.83,109.4 90 top
TP13  TESTPAD2MM  [TP-2MM]  123.4,109.4 90 top
TP14  TESTPAD2MM  [TP-2MM]  127.21,109.4 90 top
TP15  TESTPAD2MM  [TP-2MM]  131.02,109.4 90 top
TP16  TESTPAD2MM  [TP-2MM]  134.83,109.4 90 top
TP17  TESTPAD2MM  [TP-2MM]  43.4,175.9 90 top
TP18  TESTPAD2MM  [TP-2MM]  47.21,175.9 90 top
TP19  TESTPAD2MM  [TP-2MM]  51.02,175.9 90 top
TP20  TESTPAD2MM  [TP-2MM]  54.83,175.9 90 top
TP21  TESTPAD2MM  [TP-2MM]  123.4,175.9 90 top
TP22  TESTPAD2MM  [TP-2MM]  127.21,175.9 90 top
TP23  TESTPAD2MM  [TP-2MM]  131.02,175.9 90 top
TP24  TESTPAD2MM  [TP-2MM]  134.83,175.9 90 top
U1  STM32L011F4P6  [TSSOP20]  58,37.5 270 top
U2  STM32L011F4P6  [TSSOP20]  138,37.5 270 top
U3  STM32L011F4P6  [TSSOP20]  58,104 270 top
U4  STM32L011F4P6  [TSSOP20]  138,104 270 top
U5  STM32L011F4P6  [TSSOP20]  58,170.5 270 top
U6  STM32L011F4P6  [TSSOP20]  138,170.5 270 top
U$1  [MOUSE_BITE_2MM]  30.68,6.58 140.8 top
U$2  [MOUSE_BITE_2MM]  51.32,6.58 219.2 top
U$3  [FIDUCIAL_1MM+2MM+CREAM]  41,15.5 0 top
U$4  [FIDUCIAL_1MM+2MM+CREAM]  41,45.5 0 top
U$5  [FIDUCIAL_1MM+2MM+CREAM]  21,41.5 0 top
U$6  [SCRITTA2]  40.5,33.5 0 bottom
U$7  [MOUSE_BITE_2MM]  110.68,6.58 140.8 top
U$8  [MOUSE_BITE_2MM]  131.32,6.58 219.2 top
U$9  [FIDUCIAL_1MM+2MM+CREAM]  121,15.5 0 top
U$10  [FIDUCIAL_1MM+2MM+CREAM]  121,45.5 0 top
U$11  [FIDUCIAL_1MM+2MM+CREAM]  101,41.5 0 top
U$12  [SCRITTA2]  120.5,33.5 0 bottom
U$13  [MOUSE_BITE_2MM]  30.68,73.08 140.8 top
U$14  [MOUSE_BITE_2MM]  51.32,73.08 219.2 top
U$15  [FIDUCIAL_1MM+2MM+CREAM]  41,82 0 top
U$16  [FIDUCIAL_1MM+2MM+CREAM]  41,112 0 top
U$17  [FIDUCIAL_1MM+2MM+CREAM]  21,108 0 top
U$18  [SCRITTA2]  40.5,100 0 bottom
U$19  [MOUSE_BITE_2MM]  110.68,73.08 140.8 top
U$20  [MOUSE_BITE_2MM]  131.32,73.08 219.2 top
U$21  [FIDUCIAL_1MM+2MM+CREAM]  121,82 0 top
U$22  [FIDUCIAL_1MM+2MM+CREAM]  121,112 0 top
U$23  [FIDUCIAL_1MM+2MM+CREAM]  101,108 0 top
U$24  [SCRITTA2]  120.5,100 0 bottom
U$25  [MOUSE_BITE_2MM]  30.68,139.58 140.8 top
U$26  [MOUSE_BITE_2MM]  51.32,139.58 219.2 top
U$27  [FIDUCIAL_1MM+2MM+CREAM]  41,148.5 0 top
U$28  [FIDUCIAL_1MM+2MM+CREAM]  41,178.5 0 top
U$29  [FIDUCIAL_1MM+2MM+CREAM]  21,174.5 0 top
U$30  [SCRITTA2]  40.5,166.5 0 bottom
U$31  [MOUSE_BITE_2MM]  110.68,139.58 140.8 top
U$32  [MOUSE_BITE_2MM]  131.32,139.58 219.2 top
U$33  [FIDUCIAL_1MM+2MM+CREAM]  121,148.5 0 top
U$34  [FIDUCIAL_1MM+2MM+CREAM]  121,178.5 0 top
U$35  [FIDUCIAL_1MM+2MM+CREAM]  101,174.5 0 top
U$36  [SCRITTA2]  120.5,166.5 0 bottom

## Library data of the parts
1-12 U$1-U$5 U$7-U$11 U$13-U$17 U$19-U$23 U$25-U$29 U$31-U$35 = AlmaPANEL
BATT1-BATT6 = AlmaBATT; PARTNO: BK-883-TR
C1 C4 C7 C10 C13 C16 C19 C22 C25 C28 C31 C34 = AlmaPASS; PARTNO: CL21A106KQCLRNC
C2 C3 C5 C6 C8 C9 C11 C12 C14 C15 C17 C18 C20 C21 C23 C24 C26 C27 C29 C30 C32 C33 C35 C36 = AlmaPASS; PARTNO: CL10B104KB8NNNC
LED1-LED180 = AlmaOPTO; PARTNO: LTST-C230KRKT
R1-R186 = AlmaPASS; PARTNO: RMCF0603JT1K00
S1-S6 = switch-tact; PARTNO: DTSM-3
TP1-TP24 = AlmaCONN; DNP: T; PARTNO: DNP
U1-U6 = AlmaIC; PARTNO: STM32L011F4P6
U$6 U$12 U$18 U$24 U$30 U$36 = cesso

## Nets
+3V1: BATT2.V+2 C7.1 C8.1 C10.1 C11.1 C12.1 S2.1 TP5.TP U2.5 U2.16
+3V2: BATT3.V+2 C13.1 C14.1 C16.1 C17.1 C18.1 S3.1 TP9.TP U3.5 U3.16
+3V3: BATT1.V+2 C1.1 C2.1 C4.1 C5.1 C6.1 S1.1 TP1.TP U1.5 U1.16
+3V4: BATT4.V+2 C19.1 C20.1 C22.1 C23.1 C24.1 S4.1 TP13.TP U4.5 U4.16
+3V5: BATT5.V+2 C25.1 C26.1 C28.1 C29.1 C30.1 S5.1 TP17.TP U5.5 U5.16
+3V6: BATT6.V+2 C31.1 C32.1 C34.1 C35.1 C36.1 S6.1 TP21.TP U6.5 U6.16
GND: BATT1.V- C1.2 C2.2 C3.2 C4.2 C5.2 C6.2 LED1.K LED2.K LED3.K LED4.K LED5.K LED6.K LED7.K LED8.K LED9.K LED10.K LED11.K LED12.K LED13.K LED14.K LED15.K LED16.K LED17.K LED18.K LED19.K LED20.K LED21.K LED22.K LED23.K LED24.K LED25.K LED26.K LED27.K LED28.K LED29.K LED30.K R31.1 TP3.TP U1.1 U1.15
GND1: BATT2.V- C7.2 C8.2 C9.2 C10.2 C11.2 C12.2 LED31.K LED32.K LED33.K LED34.K LED35.K LED36.K LED37.K LED38.K LED39.K LED40.K LED41.K LED42.K LED43.K LED44.K LED45.K LED46.K LED47.K LED48.K LED49.K LED50.K LED51.K LED52.K LED53.K LED54.K LED55.K LED56.K LED57.K LED58.K LED59.K LED60.K R62.1 TP7.TP U2.1 U2.15
GND2: BATT3.V- C13.2 C14.2 C15.2 C16.2 C17.2 C18.2 LED61.K LED62.K LED63.K LED64.K LED65.K LED66.K LED67.K LED68.K LED69.K LED70.K LED71.K LED72.K LED73.K LED74.K LED75.K LED76.K LED77.K LED78.K LED79.K LED80.K LED81.K LED82.K LED83.K LED84.K LED85.K LED86.K LED87.K LED88.K LED89.K LED90.K R93.1 TP11.TP U3.1 U3.15
GND3: BATT4.V- C19.2 C20.2 C21.2 C22.2 C23.2 C24.2 LED91.K LED92.K LED93.K LED94.K LED95.K LED96.K LED97.K LED98.K LED99.K LED100.K LED101.K LED102.K LED103.K LED104.K LED105.K LED106.K LED107.K LED108.K LED109.K LED110.K LED111.K LED112.K LED113.K LED114.K LED115.K LED116.K LED117.K LED118.K LED119.K LED120.K R124.1 TP15.TP U4.1 U4.15
GND4: BATT5.V- C25.2 C26.2 C27.2 C28.2 C29.2 C30.2 LED121.K LED122.K LED123.K LED124.K LED125.K LED126.K LED127.K LED128.K LED129.K LED130.K LED131.K LED132.K LED133.K LED134.K LED135.K LED136.K LED137.K LED138.K LED139.K LED140.K LED141.K LED142.K LED143.K LED144.K LED145.K LED146.K LED147.K LED148.K LED149.K LED150.K R155.1 TP19.TP U5.1 U5.15
GND5: BATT6.V- C31.2 C32.2 C33.2 C34.2 C35.2 C36.2 LED151.K LED152.K LED153.K LED154.K LED155.K LED156.K LED157.K LED158.K LED159.K LED160.K LED161.K LED162.K LED163.K LED164.K LED165.K LED166.K LED167.K LED168.K LED169.K LED170.K LED171.K LED172.K LED173.K LED174.K LED175.K LED176.K LED177.K LED178.K LED179.K LED180.K R186.1 TP23.TP U6.1 U6.15
LED1: R1.2 R6.2 R11.2 R16.2 R21.2 R26.2 U1.10
LED2: R2.2 R7.2 R12.2 R17.2 R22.2 R27.2 U1.9
LED3: R3.2 R8.2 R13.2 R18.2 R23.2 R28.2 U1.8
LED4: R4.2 R9.2 R14.2 R19.2 R24.2 R29.2 U1.7
LED5: R5.2 R10.2 R15.2 R20.2 R25.2 R30.2 U1.17
LED6: R32.2 R37.2 R42.2 R47.2 R52.2 R57.2 U2.10
LED7: R33.2 R38.2 R43.2 R48.2 R53.2 R58.2 U2.9
LED8: R34.2 R39.2 R44.2 R49.2 R54.2 R59.2 U2.8
LED9: R35.2 R40.2 R45.2 R50.2 R55.2 R60.2 U2.7
LED10: R36.2 R41.2 R46.2 R51.2 R56.2 R61.2 U2.17
LED11: R63.2 R68.2 R73.2 R78.2 R83.2 R88.2 U3.10
LED12: R64.2 R69.2 R74.2 R79.2 R84.2 R89.2 U3.9
LED13: R65.2 R70.2 R75.2 R80.2 R85.2 R90.2 U3.8
LED14: R66.2 R71.2 R76.2 R81.2 R86.2 R91.2 U3.7
LED15: R67.2 R72.2 R77.2 R82.2 R87.2 R92.2 U3.17
LED16: R94.2 R99.2 R104.2 R109.2 R114.2 R119.2 U4.10
LED17: R95.2 R100.2 R105.2 R110.2 R115.2 R120.2 U4.9
LED18: R96.2 R101.2 R106.2 R111.2 R116.2 R121.2 U4.8
LED19: R97.2 R102.2 R107.2 R112.2 R117.2 R122.2 U4.7
LED20: R98.2 R103.2 R108.2 R113.2 R118.2 R123.2 U4.17
LED21: R125.2 R130.2 R135.2 R140.2 R145.2 R150.2 U5.10
LED22: R126.2 R131.2 R136.2 R141.2 R146.2 R151.2 U5.9
LED23: R127.2 R132.2 R137.2 R142.2 R147.2 R152.2 U5.8
LED24: R128.2 R133.2 R138.2 R143.2 R148.2 R153.2 U5.7
LED25: R129.2 R134.2 R139.2 R144.2 R149.2 R154.2 U5.17
LED26: R156.2 R161.2 R166.2 R171.2 R176.2 R181.2 U6.10
LED27: R157.2 R162.2 R167.2 R172.2 R177.2 R182.2 U6.9
LED28: R158.2 R163.2 R168.2 R173.2 R178.2 R183.2 U6.8
LED29: R159.2 R164.2 R169.2 R174.2 R179.2 R184.2 U6.7
LED30: R160.2 R165.2 R170.2 R175.2 R180.2 R185.2 U6.17
N$1: LED1.A R1.1
N$2: LED2.A R2.1
N$3: LED3.A R3.1
N$4: LED4.A R4.1
N$5: LED5.A R5.1
N$6: LED6.A R6.1
N$7: LED7.A R7.1
N$8: LED8.A R8.1
N$9: LED9.A R9.1
N$10: LED10.A R10.1
N$11: LED11.A R11.1
N$12: LED12.A R12.1
N$13: LED13.A R13.1
N$14: LED14.A R14.1
N$15: LED15.A R15.1
N$16: LED16.A R16.1
N$17: LED17.A R17.1
N$18: LED18.A R18.1
N$19: LED19.A R19.1
N$20: LED20.A R20.1
N$21: LED21.A R21.1
N$22: LED22.A R22.1
N$23: LED23.A R23.1
N$24: LED24.A R24.1
N$25: LED25.A R25.1
N$26: LED26.A R26.1
N$27: LED27.A R27.1
N$28: LED28.A R28.1
N$29: LED29.A R29.1
N$30: LED30.A R30.1
N$31: LED31.A R32.1
N$32: LED32.A R33.1
N$33: LED33.A R34.1
N$34: LED34.A R35.1
N$35: LED35.A R36.1
N$36: LED36.A R37.1
N$37: LED37.A R38.1
N$38: LED38.A R39.1
N$39: LED39.A R40.1
N$40: LED40.A R41.1
N$41: LED41.A R42.1
N$42: LED42.A R43.1
N$43: LED43.A R44.1
N$44: LED44.A R45.1
N$45: LED45.A R46.1
N$46: LED46.A R47.1
N$47: LED47.A R48.1
N$48: LED48.A R49.1
N$49: LED49.A R50.1
N$50: LED50.A R51.1
N$51: LED51.A R52.1
N$52: LED52.A R53.1
N$53: LED53.A R54.1
N$54: LED54.A R55.1
N$55: LED55.A R56.1
N$56: LED56.A R57.1
N$57: LED57.A R58.1
N$58: LED58.A R59.1
N$59: LED59.A R60.1
N$60: LED60.A R61.1
N$61: LED61.A R63.1
N$62: LED62.A R64.1
N$63: LED63.A R65.1
N$64: LED64.A R66.1
N$65: LED65.A R67.1
N$66: LED66.A R68.1
N$67: LED67.A R69.1
N$68: LED68.A R70.1
N$69: LED69.A R71.1
N$70: LED70.A R72.1
N$71: LED71.A R73.1
N$72: LED72.A R74.1
N$73: LED73.A R75.1
N$74: LED74.A R76.1
N$75: LED75.A R77.1
N$76: LED76.A R78.1
N$77: LED77.A R79.1
N$78: LED78.A R80.1
N$79: LED79.A R81.1
N$80: LED80.A R82.1
N$81: LED81.A R83.1
N$82: LED82.A R84.1
N$83: LED83.A R85.1
N$84: LED84.A R86.1
N$85: LED85.A R87.1
N$86: LED86.A R88.1
N$87: LED87.A R89.1
N$88: LED88.A R90.1
N$89: LED89.A R91.1
N$90: LED90.A R92.1
N$91: LED91.A R94.1
N$92: LED92.A R95.1
N$93: LED93.A R96.1
N$94: LED94.A R97.1
N$95: LED95.A R98.1
N$96: LED96.A R99.1
N$97: LED97.A R100.1
N$98: LED98.A R101.1
N$99: LED99.A R102.1
N$100: LED100.A R103.1
N$101: LED101.A R104.1
N$102: LED102.A R105.1
N$103: LED103.A R106.1
N$104: LED104.A R107.1
N$105: LED105.A R108.1
N$106: LED106.A R109.1
N$107: LED107.A R110.1
N$108: LED108.A R111.1
N$109: LED109.A R112.1
N$110: LED110.A R113.1
N$111: LED111.A R114.1
N$112: LED112.A R115.1
N$113: LED113.A R116.1
N$114: LED114.A R117.1
N$115: LED115.A R118.1
N$116: LED116.A R119.1
N$117: LED117.A R120.1
N$118: LED118.A R121.1
N$119: LED119.A R122.1
N$120: LED120.A R123.1
N$121: LED121.A R125.1
N$122: LED122.A R126.1
N$123: LED123.A R127.1
N$124: LED124.A R128.1
N$125: LED125.A R129.1
N$126: LED126.A R130.1
N$127: LED127.A R131.1
N$128: LED128.A R132.1
N$129: LED129.A R133.1
N$130: LED130.A R134.1
N$131: LED131.A R135.1
N$132: LED132.A R136.1
N$133: LED133.A R137.1
N$134: LED134.A R138.1
N$135: LED135.A R139.1
N$136: LED136.A R140.1
N$137: LED137.A R141.1
N$138: LED138.A R142.1
N$139: LED139.A R143.1
N$140: LED140.A R144.1
N$141: LED141.A R145.1
N$142: LED142.A R146.1
N$143: LED143.A R147.1
N$144: LED144.A R148.1
N$145: LED145.A R149.1
N$146: LED146.A R150.1
N$147: LED147.A R151.1
N$148: LED148.A R152.1
N$149: LED149.A R153.1
N$150: LED150.A R154.1
N$151: LED151.A R156.1
N$152: LED152.A R157.1
N$153: LED153.A R158.1
N$154: LED154.A R159.1
N$155: LED155.A R160.1
N$156: LED156.A R161.1
N$157: LED157.A R162.1
N$158: LED158.A R163.1
N$159: LED159.A R164.1
N$160: LED160.A R165.1
N$161: LED161.A R166.1
N$162: LED162.A R167.1
N$163: LED163.A R168.1
N$164: LED164.A R169.1
N$165: LED165.A R170.1
N$166: LED166.A R171.1
N$167: LED167.A R172.1
N$168: LED168.A R173.1
N$169: LED169.A R174.1
N$170: LED170.A R175.1
N$171: LED171.A R176.1
N$172: LED172.A R177.1
N$173: LED173.A R178.1
N$174: LED174.A R179.1
N$175: LED175.A R180.1
N$176: LED176.A R181.1
N$177: LED177.A R182.1
N$178: LED178.A R183.1
N$179: LED179.A R184.1
N$180: LED180.A R185.1
NRST: C3.1 U1.4
NRST1: C9.1 U2.4
NRST2: C15.1 U3.4
NRST3: C21.1 U4.4
NRST4: C27.1 U5.4
NRST5: C33.1 U6.4
ON: R31.2 S1.2 U1.6
ON1: R62.2 S2.2 U2.6
ON2: R93.2 S3.2 U3.6
ON3: R124.2 S4.2 U4.6
ON4: R155.2 S5.2 U5.6
ON5: R186.2 S6.2 U6.6
SWCLK: TP4.TP U1.20
SWCLK1: TP8.TP U2.20
SWCLK2: TP12.TP U3.20
SWCLK3: TP16.TP U4.20
SWCLK4: TP20.TP U5.20
SWCLK5: TP24.TP U6.20
SWDIO: TP2.TP U1.19
SWDIO1: TP6.TP U2.19
SWDIO2: TP10.TP U3.19
SWDIO3: TP14.TP U4.19
SWDIO4: TP18.TP U5.19
SWDIO5: TP22.TP U6.19

## Tracks (layer width: path | path; a pad name or v marks a point on that pad's centre or on a via)
+3V1
  Top 0.3: C8.1 137.55,31.4 | 137.55,31.4 137.55,32.5 C7.1 137.75,35.24 arc-45 138.04,35.94 139.8,37.7 arc-45 140.1,37.83 U2.16 142.06,37.83 arc45 142.77,38.12 C12.1 142.8,42.68 arc-45 C11.1 142.75,43.38 arc45 142.56,43.84 141.49,44.91 arc45 140.79,45.2 137.1,45.2 | TP5.TP 125.41,44.91 arc-45 126.11,45.2 137.1,45.2 | 137.1,45.2 137.1,43.22 arc-45 C10.1 | U2.5 134.54,37.83 arc45 134,37.6 arc45 133.8,37.12 133.8,32.6 | 133.8,32.6 133.8,29.29 | 133.8,29.29 133.8,21.64 BATT2.V+2 | 137.55,31.4 135.91,31.4 arc45 135.21,31.11 134.09,29.99 arc45 133.8,29.29 | 133.8,32.6 arc45 133.52,33.28 131.49,35.31 arc-45 131.2,36.01 131.2,37.6 arc45 130.92,38.28 129.69,39.51 arc45 128.99,39.8 106.11,39.8 arc-45 105.41,40.09 103.09,42.41 arc-45 102.8,43.11 S2.1
+3V2
  Top 0.3: C14.1 57.55,97.9 | 57.55,97.9 57.55,99 C13.1 57.75,101.74 arc-45 58.04,102.44 59.8,104.2 arc-45 60.1,104.33 U3.16 62.06,104.33 arc45 62.77,104.62 C18.1 62.8,109.18 arc-45 C17.1 62.75,109.88 arc45 62.56,110.34 61.49,111.41 arc45 60.79,111.7 57.1,111.7 | TP9.TP 45.41,111.41 arc-45 46.11,111.7 57.1,111.7 | 57.1,111.7 57.1,109.72 arc-45 C16.1 | U3.5 54.54,104.33 arc45 54,104.1 arc45 53.8,103.62 53.8,99.1 | 53.8,99.1 53.8,95.79 | 53.8,95.79 53.8,88.14 BATT3.V+2 | 57.55,97.9 55.91,97.9 arc45 55.21,97.61 54.09,96.49 arc45 53.8,95.79 | 53.8,99.1 arc45 53.52,99.78 51.49,101.81 arc-45 51.2,102.51 51.2,104.1 arc45 50.92,104.78 49.69,106.01 arc45 48.99,106.3 26.11,106.3 arc-45 25.41,106.59 23.09,108.91 arc-45 22.8,109.61 S3.1
+3V3
  Top 0.3: C2.1 57.55,31.4 | 57.55,31.4 57.55,32.5 C1.1 57.75,35.24 arc-45 58.04,35.94 59.8,37.7 arc-45 60.1,37.83 U1.16 62.06,37.83 arc45 62.77,38.12 C6.1 62.8,42.68 arc-45 C5.1 62.75,43.38 arc45 62.56,43.84 61.49,44.91 arc45 60.79,45.2 57.1,45.2 | TP1.TP 45.41,44.91 arc-45 46.11,45.2 57.1,45.2 | 57.1,45.2 57.1,43.22 arc-45 C4.1 | U1.5 54.54,37.83 arc45 54,37.6 arc45 53.8,37.12 53.8,32.6 | 53.8,32.6 53.8,29.29 | 53.8,29.29 53.8,21.64 BATT1.V+2 | 57.55,31.4 55.91,31.4 arc45 55.21,31.11 54.09,29.99 arc45 53.8,29.29 | 53.8,32.6 arc45 53.52,33.28 51.49,35.31 arc-45 51.2,36.01 51.2,37.6 arc45 50.92,38.28 49.69,39.51 arc45 48.99,39.8 26.11,39.8 arc-45 25.41,40.09 23.09,42.41 arc-45 22.8,43.11 S1.1
+3V4
  Top 0.3: C20.1 137.55,97.9 | 137.55,97.9 137.55,99 C19.1 137.75,101.74 arc-45 138.04,102.44 139.8,104.2 arc-45 140.1,104.33 U4.16 142.06,104.33 arc45 142.77,104.62 C24.1 142.8,109.18 arc-45 C23.1 142.75,109.88 arc45 142.56,110.34 141.49,111.41 arc45 140.79,111.7 137.1,111.7 | TP13.TP 125.41,111.41 arc-45 126.11,111.7 137.1,111.7 | 137.1,111.7 137.1,109.72 arc-45 C22.1 | U4.5 134.54,104.33 arc45 134,104.1 arc45 133.8,103.62 133.8,99.1 | 133.8,99.1 133.8,95.79 | 133.8,95.79 133.8,88.14 BATT4.V+2 | 137.55,97.9 135.91,97.9 arc45 135.21,97.61 134.09,96.49 arc45 133.8,95.79 | 133.8,99.1 arc45 133.52,99.78 131.49,101.81 arc-45 131.2,102.51 131.2,104.1 arc45 130.92,104.78 129.69,106.01 arc45 128.99,106.3 106.11,106.3 arc-45 105.41,106.59 103.09,108.91 arc-45 102.8,109.61 S4.1
+3V5
  Top 0.3: C26.1 57.55,164.4 | 57.55,164.4 57.55,165.5 C25.1 57.75,168.24 arc-45 58.04,168.94 59.8,170.7 arc-45 60.1,170.82 U5.16 62.06,170.82 arc45 62.77,171.12 C30.1 62.8,175.68 arc-45 C29.1 62.75,176.38 arc45 62.56,176.84 61.49,177.91 arc45 60.79,178.2 57.1,178.2 | TP17.TP 45.41,177.91 arc-45 46.11,178.2 57.1,178.2 | 57.1,178.2 57.1,176.22 arc-45 C28.1 | U5.5 54.54,170.82 arc45 54,170.6 arc45 53.8,170.12 53.8,165.6 | 53.8,165.6 53.8,162.29 | 53.8,162.29 53.8,154.65 BATT5.V+2 | 57.55,164.4 55.91,164.4 arc45 55.21,164.11 54.09,162.99 arc45 53.8,162.29 | 53.8,165.6 arc45 53.52,166.28 51.49,168.31 arc-45 51.2,169.01 51.2,170.6 arc45 50.92,171.28 49.69,172.51 arc45 48.99,172.8 26.11,172.8 arc-45 25.41,173.09 23.09,175.41 arc-45 22.8,176.11 S5.1
+3V6
  Top 0.3: C32.1 137.55,164.4 | 137.55,164.4 137.55,165.5 C31.1 137.75,168.24 arc-45 138.04,168.94 139.8,170.7 arc-45 140.1,170.82 U6.16 142.06,170.82 arc45 142.77,171.12 C36.1 142.8,175.68 arc-45 C35.1 142.75,176.38 arc45 142.56,176.84 141.49,177.91 arc45 140.79,178.2 137.1,178.2 | TP21.TP 125.41,177.91 arc-45 126.11,178.2 137.1,178.2 | 137.1,178.2 137.1,176.22 arc-45 C34.1 | U6.5 134.54,170.82 arc45 134,170.6 arc45 133.8,170.12 133.8,165.6 | 133.8,165.6 133.8,162.29 | 133.8,162.29 133.8,154.65 BATT6.V+2 | 137.55,164.4 135.91,164.4 arc45 135.21,164.11 134.09,162.99 arc45 133.8,162.29 | 133.8,165.6 arc45 133.52,166.28 131.49,168.31 arc-45 131.2,169.01 131.2,170.6 arc45 130.92,171.28 129.69,172.51 arc45 128.99,172.8 106.11,172.8 arc-45 105.41,173.09 103.09,175.41 arc-45 102.8,176.11 S6.1
GND  (via drill 0.3)
  Top 0.3: C6.2 62.37,36.88 arc45 61.66,37.17 U1.15 | U1.1 53.24,40.42 arc45 52.53,40.13 52.09,39.69 arc45 51.8,38.99 51.8,36.61 arc45 52.09,35.91 v53,35 | LED12.K arc-45 22.8,21.74 v22.8,23 | LED16.K LED16.K arc-45 43.61,3.8 v44.4,3.8
  other vias: 29,16.5 34,11.5 59.3,44.5 60.82,33.28 42.9,53.6 52,26.4 39.2,7.7
  pour Top (isolate 0.4): 5,-0.5 5,65.5 75,65.5 75,-0.5
  pour Bottom (no thermals): 75,-0.5 75,63.5 5,63.5 5,-0.5
GND1  (via drill 0.3)
  Top 0.3: C12.2 142.37,36.88 arc45 141.66,37.17 U2.15 | U2.1 133.24,40.42 arc45 132.53,40.13 132.09,39.69 arc45 131.8,38.99 131.8,36.61 arc45 132.09,35.91 v133,35 | LED42.K arc-45 102.8,21.74 v102.8,23 | LED46.K LED46.K arc-45 123.61,3.8 v124.4,3.8
  other vias: 109,16.5 114,11.5 139.3,44.5 140.82,33.28 122.9,53.6 132,26.4 119.2,7.7
  pour Top (isolate 0.4): 85,-0.5 85,65.5 155,65.5 155,-0.5
  pour Bottom (no thermals): 155,-0.5 155,63.5 85,63.5 85,-0.5
GND2  (via drill 0.3)
  Top 0.3: C18.2 62.37,103.38 arc45 61.66,103.67 U3.15 | U3.1 53.24,106.92 arc45 52.53,106.63 52.09,106.19 arc45 51.8,105.49 51.8,103.11 arc45 52.09,102.41 v53,101.5 | LED72.K arc-45 22.8,88.24 v22.8,89.5 | LED76.K LED76.K arc-45 43.61,70.3 v44.4,70.3
  other vias: 29,83 34,78 59.3,111 60.82,99.78 42.9,120.1 52,92.9 39.2,74.2
  pour Top (isolate 0.4): 5,66 5,132 75,132 75,66
  pour Bottom (no thermals): 75,66 75,130 5,130 5,66
GND3  (via drill 0.3)
  Top 0.3: C24.2 142.37,103.38 arc45 141.66,103.67 U4.15 | U4.1 133.24,106.92 arc45 132.53,106.63 132.09,106.19 arc45 131.8,105.49 131.8,103.11 arc45 132.09,102.41 v133,101.5 | LED102.K arc-45 102.8,88.24 v102.8,89.5 | LED106.K LED106.K arc-45 123.61,70.3 v124.4,70.3
  other vias: 109,83 114,78 139.3,111 140.82,99.78 122.9,120.1 132,92.9 119.2,74.2
  pour Top (isolate 0.4): 85,66 85,132 155,132 155,66
  pour Bottom (no thermals): 155,66 155,130 85,130 85,66
GND4  (via drill 0.3)
  Top 0.3: C30.2 62.37,169.88 arc45 61.66,170.18 U5.15 | U5.1 53.24,173.43 arc45 52.53,173.13 52.09,172.69 arc45 51.8,171.99 51.8,169.61 arc45 52.09,168.91 v53,168 | LED132.K arc-45 22.8,154.74 v22.8,156 | LED136.K LED136.K arc-45 43.61,136.8 v44.4,136.8
  other vias: 29,149.5 34,144.5 59.3,177.5 60.82,166.28 42.9,186.6 52,159.4 39.2,140.7
  pour Top (isolate 0.4): 5,132.5 5,198.5 75,198.5 75,132.5
  pour Bottom (no thermals): 75,132.5 75,196.5 5,196.5 5,132.5
GND5  (via drill 0.3)
  Top 0.3: C36.2 142.37,169.88 arc45 141.66,170.18 U6.15 | U6.1 133.24,173.43 arc45 132.53,173.13 132.09,172.69 arc45 131.8,171.99 131.8,169.61 arc45 132.09,168.91 v133,168 | LED162.K arc-45 102.8,154.74 v102.8,156 | LED166.K LED166.K arc-45 123.61,136.8 v124.4,136.8
  other vias: 109,149.5 114,144.5 139.3,177.5 140.82,166.28 122.9,186.6 132,159.4 119.2,140.7
  pour Top (isolate 0.4): 85,132.5 85,198.5 155,198.5 155,132.5
  pour Bottom (no thermals): 155,132.5 155,196.5 85,196.5 85,132.5
LED1  (via drill 0.3)
  Top 0.3: R11.2 24.37,24.1 arc-45 25.08,23.81 v25.18,23.7 | R16.2 41.85,9.44 arc45 41.56,10.14 v40.9,10.8 | R21.2 61.81,28.8 arc45 61.11,28.51 v60.7,28.1 | v19.48,48.42 19.09,48.81 arc45 18.39,49.1 R6.2 | v56.9,34 arc-45 56.73,34.07 56.5,34.3 arc45 55.84,34.58 U1.10 | R26.2 arc-45 61.4,52.6 61.2,52.4 arc-45 60.72,52.2 v60.2,52.2 | R1.2 42.09,52.5 arc-45 v42.79,52.21 v42.8,52.2
  Bottom 0.3: v42.8,52.2 45.95,49.05 arc45 46.31,48.9 | 25.2,23.7 16.19,32.71 arc-45 15.9,33.41 15.9,44.39 arc-45 16.19,45.09 19.56,48.46 | 25.2,23.7 37.81,11.09 arc45 38.51,10.8 v40.9,10.8 42.99,10.8 arc45 43.69,11.09 v60.7,28.1 65.51,32.91 arc45 65.8,33.61 65.8,45.85 arc45 65.51,46.56 60.44,51.63 arc-45 v60.2,52.2 | 25.2,23.7 v25.18,23.7 | 46.31,48.9 20.41,48.9 arc45 19.71,48.61 19.56,48.46 | 19.56,48.46 arc-45 v19.48,48.42 | v56.9,34 58.59,34 arc45 59.29,34.29 62.61,37.61 arc45 62.9,38.31 62.9,45.21 arc45 62.61,45.92 59.92,48.61 arc45 59.21,48.9 46.31,48.9
LED2  (via drill 0.3)
  Top 0.3: R22.2 65.3,33.8 arc-45 65.16,33.46 v64.55,32.85 | R17.2 46.04,11.11 arc45 45.34,11.4 v41.83,11.4 | R12.2 22.75,16.06 arc45 23.04,15.36 24.91,13.49 arc45 25.61,13.2 36.19,13.2 arc-45 36.89,12.91 v37.3,12.5 | R7.2 13.99,44.1 arc-45 14.69,43.81 16.21,42.29 arc-45 16.5,41.59 v16.5,40.9 | R2.2 37.56,48.59 arc45 38.26,48.3 v38.9,48.3 | U1.9 56.06,35.23 arc-45 56.77,34.93 v56.9,34.8 | R27.2 57.95,52.73 arc45 57.96,52.69 v57.96,52.2
  Bottom 0.3: 42.69,11.4 arc45 43.39,11.69 | 43.39,11.69 v64.55,32.85 65.01,33.31 arc45 65.3,34.01 65.3,45.64 arc45 65.01,46.35 60.45,50.91 arc45 59.74,51.2 59.38,51.2 arc-45 58.67,51.49 v57.96,52.2 | 43.39,11.69 arc-45 42.69,11.4 | 42.69,11.4 v41.83,11.4 38.81,11.4 arc-45 38.11,11.69 v37.3,12.5 16.79,33.01 arc-45 16.5,33.71 v16.5,40.9 16.5,44.19 arc-45 16.79,44.89 19.91,48.01 arc-45 20.61,48.3 v38.9,48.3 59.11,48.3 arc-45 59.81,48.01 62.01,45.81 arc-45 62.3,45.11 62.3,38.42 arc-45 62.01,37.71 59.39,35.09 arc-45 58.68,34.8 v56.9,34.8
LED3  (via drill 0.3)
  Top 0.3: R28.2 arc45 56.6,54.11 v56.6,52.2 | R23.2 66.01,38.8 arc45 65.31,38.51 64.99,38.19 arc45 64.7,37.49 v64.7,36.9 | R18.2 52.65,14.34 arc45 52.36,15.04 52.1,15.3 arc45 51.62,15.5 46.77,15.5 arc45 46.06,15.21 v45.65,14.8 | R13.2 36.19,14.1 arc-45 36.89,13.81 v37.05,13.65 | R8.2 14.99,39.1 arc-45 15.69,38.81 16.81,37.69 arc-45 17.1,36.99 v17.1,36.6 | v32.93,47.63 arc-45 32.67,47.73 32.3,48.1 arc-45 32.05,48.7 R3.2 | U1.8 56.24,35.88 arc-45 v56.9,35.6
  Bottom 0.3: 45.69,14.89 64.41,33.61 arc45 64.7,34.31 v64.7,36.9 64.7,45.54 arc45 64.41,46.24 60.24,50.41 arc45 59.54,50.7 58.51,50.7 arc-45 57.81,50.99 v56.6,52.2 | 45.69,14.89 43.09,12.29 arc-45 42.39,12 39.01,12 arc-45 38.48,12.22 v37.05,13.65 17.39,33.31 arc-45 17.1,34.01 v17.1,36.6 17.1,43.99 arc-45 17.39,44.69 20.03,47.33 arc-45 20.74,47.63 v32.93,47.63 59.07,47.63 arc-45 59.78,47.33 61.41,45.71 arc-45 61.7,45 61.7,38.53 arc-45 61.41,37.82 59.48,35.89 arc-45 58.77,35.6 v56.9,35.6 | v45.65,14.8 arc-45 45.69,14.89
LED4  (via drill 0.3)
  Top 0.3: R24.2 66.01,43.8 arc45 65.31,43.51 64.39,42.59 arc45 64.1,41.89 v64.1,40.6 | R19.2 56.35,13.86 arc-45 56.06,13.16 55.7,12.8 arc-45 55.22,12.6 54.6,12.6 arc-45 54.09,12.81 53.89,13.01 arc-45 53.6,13.71 53.6,14.49 arc45 53.31,15.19 52.79,15.71 arc45 52.09,16 46.31,16 arc45 45.61,15.71 v45.45,15.55 | R9.2 17.09,34.1 arc-45 17.79,33.81 v18.15,33.45 | R14.2 36.79,9.2 arc45 37.49,9.49 39.01,11.01 arc45 39.3,11.71 v39.3,12.6 | U1.7 56.6,36.52 arc-45 v56.9,36.4 | v52,52.2 52,52.44 arc45 51.71,53.14 R29.2 | v23.8,47 arc45 24.31,47.21 24.76,47.66 arc45 25.05,48.36 R4.2
  Bottom 0.3: 39.41,12.6 arc-45 38.71,12.89 v18.15,33.45 17.99,33.61 arc-45 17.7,34.31 17.7,43.69 arc-45 17.99,44.39 20.31,46.71 arc-45 21.01,47 v23.8,47 58.99,47 arc-45 59.7,46.71 60.81,45.6 arc-45 61.1,44.89 61.1,38.64 arc-45 60.81,37.93 59.57,36.69 arc-45 58.86,36.4 v56.9,36.4 | 39.41,12.6 42.09,12.6 arc45 42.79,12.89 v45.45,15.55 63.81,33.91 arc45 64.1,34.61 v64.1,40.6 64.1,45.43 arc45 63.81,46.14 60.14,49.81 arc45 59.43,50.1 54.51,50.1 arc-45 53.81,50.39 v52,52.2 | v39.3,12.6 39.41,12.6
LED5  (via drill 0.3)
  Top 0.3: R15.2 37.39,5.2 arc45 38.09,5.49 39.61,7.01 arc45 39.9,7.71 v39.9,13.2 | v61.63,32.6 61.63,31.34 arc-45 61.33,30.63 59.64,28.94 arc45 59.35,28.24 R20.2 | v63.5,45.4 63.5,46.79 arc-45 63.79,47.49 64.81,48.51 arc-45 65.51,48.8 R25.2 | v23.85,28.65 23.69,28.81 arc45 22.99,29.1 R10.2 | v20.15,45.65 20.36,45.86 arc45 20.65,46.56 R5.2 | v56.9,37.2 57.97,37.2 arc45 58.67,37.49 59.36,38.18 arc-45 60.07,38.48 U1.17 | v49.2,52.2 49.76,51.64 arc-45 50.05,50.94 R30.2
  Bottom 0.3: 61.75,32.75 63.14,34.14 arc45 63.5,35.01 v63.5,45.4 arc45 63.26,45.97 60.03,49.21 arc45 59.32,49.5 52.31,49.5 arc-45 51.61,49.79 v49.2,52.2 | 61.75,32.75 61.63,32.7 arc-45 v61.63,32.6 | 61.75,32.75 42.49,13.49 arc-45 41.79,13.2 v39.9,13.2 39.71,13.2 arc-45 39.01,13.49 v23.85,28.65 18.49,34.01 arc-45 18.2,34.71 18.2,43.29 arc-45 18.49,43.99 v20.15,45.65 20.61,46.11 arc-45 21.31,46.4 58.89,46.4 arc-45 59.59,46.11 60.21,45.49 arc-45 60.5,44.79 60.5,38.74 arc-45 60.21,38.04 59.66,37.49 arc-45 58.96,37.2 v56.9,37.2
LED6  (via drill 0.3)
  Top 0.3: R42.2 104.37,24.1 arc-45 105.08,23.81 v105.19,23.7 | R47.2 121.85,9.44 arc45 121.56,10.14 v120.9,10.8 | R52.2 141.81,28.8 arc45 141.11,28.51 v140.7,28.1 | v99.48,48.42 99.09,48.81 arc45 98.39,49.1 R37.2 | v136.9,34 arc-45 136.73,34.07 136.5,34.3 arc45 135.84,34.58 U2.10 | R57.2 arc-45 141.4,52.6 141.2,52.4 arc-45 140.72,52.2 v140.2,52.2 | R32.2 122.09,52.5 arc-45 v122.79,52.21 v122.8,52.2
  Bottom 0.3: v122.8,52.2 125.95,49.05 arc45 126.31,48.9 | v105.2,23.7 96.19,32.71 arc-45 95.9,33.41 95.9,44.39 arc-45 96.19,45.09 99.56,48.46 | v105.2,23.7 117.81,11.09 arc45 118.51,10.8 v120.9,10.8 122.99,10.8 arc45 123.69,11.09 v140.7,28.1 145.51,32.91 arc45 145.8,33.61 145.8,45.85 arc45 145.51,46.56 140.44,51.63 arc-45 v140.2,52.2 | v105.2,23.7 v105.19,23.7 | 126.31,48.9 100.41,48.9 arc45 99.71,48.61 99.56,48.46 | 99.56,48.46 arc-45 v99.48,48.42 | v136.9,34 138.59,34 arc45 139.29,34.29 142.61,37.61 arc45 142.9,38.31 142.9,45.21 arc45 142.61,45.92 139.92,48.61 arc45 139.21,48.9 126.31,48.9
LED7  (via drill 0.3)
  Top 0.3: R53.2 145.3,33.8 arc-45 145.16,33.46 v144.55,32.85 | R48.2 126.04,11.11 arc45 125.34,11.4 v121.83,11.4 | R43.2 102.75,16.06 arc45 103.04,15.36 104.91,13.49 arc45 105.61,13.2 116.19,13.2 arc-45 116.89,12.91 v117.3,12.5 | R38.2 93.99,44.1 arc-45 94.69,43.81 96.21,42.29 arc-45 96.5,41.59 v96.5,40.9 | R33.2 117.56,48.59 arc45 118.26,48.3 v118.9,48.3 | U2.9 136.06,35.23 arc-45 136.77,34.93 v136.9,34.8 | R58.2 137.95,52.73 arc45 137.96,52.69 v137.96,52.2
  Bottom 0.3: 122.69,11.4 arc45 123.39,11.69 | 123.39,11.69 v144.55,32.85 145.01,33.31 arc45 145.3,34.01 145.3,45.64 arc45 145.01,46.35 140.45,50.91 arc45 139.74,51.2 139.38,51.2 arc-45 138.67,51.49 v137.96,52.2 | 123.39,11.69 arc-45 122.69,11.4 | 122.69,11.4 v121.83,11.4 118.81,11.4 arc-45 118.11,11.69 v117.3,12.5 96.79,33.01 arc-45 96.5,33.71 v96.5,40.9 96.5,44.19 arc-45 96.79,44.89 99.91,48.01 arc-45 100.61,48.3 v118.9,48.3 139.11,48.3 arc-45 139.81,48.01 142.01,45.81 arc-45 142.3,45.11 142.3,38.42 arc-45 142.01,37.71 139.39,35.09 arc-45 138.68,34.8 v136.9,34.8
LED8  (via drill 0.3)
  Top 0.3: R59.2 arc45 136.6,54.11 v136.6,52.2 | R54.2 146.01,38.8 arc45 145.31,38.51 144.99,38.19 arc45 144.7,37.49 v144.7,36.9 | R49.2 132.65,14.34 arc45 132.36,15.04 132.1,15.3 arc45 131.62,15.5 126.77,15.5 arc45 126.06,15.21 v125.65,14.8 | R44.2 116.19,14.1 arc-45 116.89,13.81 v117.05,13.65 | R39.2 94.99,39.1 arc-45 95.69,38.81 96.81,37.69 arc-45 97.1,36.99 v97.1,36.6 | v112.93,47.63 arc-45 112.67,47.73 112.3,48.1 arc-45 112.05,48.7 R34.2 | U2.8 136.24,35.88 arc-45 v136.9,35.6
  Bottom 0.3: 125.69,14.89 144.41,33.61 arc45 144.7,34.31 v144.7,36.9 144.7,45.54 arc45 144.41,46.24 140.24,50.41 arc45 139.54,50.7 138.51,50.7 arc-45 137.81,50.99 v136.6,52.2 | 125.69,14.89 123.09,12.29 arc-45 122.39,12 119.01,12 arc-45 118.48,12.22 v117.05,13.65 97.39,33.31 arc-45 97.1,34.01 v97.1,36.6 97.1,43.99 arc-45 97.39,44.69 100.03,47.33 arc-45 100.74,47.63 v112.93,47.63 139.07,47.63 arc-45 139.78,47.33 141.41,45.71 arc-45 141.7,45 141.7,38.53 arc-45 141.41,37.82 139.48,35.89 arc-45 138.77,35.6 v136.9,35.6 | v125.65,14.8 arc-45 125.69,14.89
LED9  (via drill 0.3)
  Top 0.3: R55.2 146.01,43.8 arc45 145.31,43.51 144.39,42.59 arc45 144.1,41.89 v144.1,40.6 | R50.2 136.35,13.86 arc-45 136.06,13.16 135.7,12.8 arc-45 135.22,12.6 134.6,12.6 arc-45 134.09,12.81 133.89,13.01 arc-45 133.6,13.71 133.6,14.49 arc45 133.31,15.19 132.79,15.71 arc45 132.09,16 126.31,16 arc45 125.61,15.71 v125.45,15.55 | R40.2 97.09,34.1 arc-45 97.79,33.81 v98.15,33.45 | R45.2 116.79,9.2 arc45 117.49,9.49 119.01,11.01 arc45 119.3,11.71 v119.3,12.6 | U2.7 136.6,36.52 arc-45 v136.9,36.4 | v132,52.2 132,52.44 arc45 131.71,53.14 R60.2 | v103.8,47 arc45 104.31,47.21 104.76,47.66 arc45 105.05,48.36 R35.2